# EAGLE board SparkFun_lsm9ds0-breakout-Panel-v10 (EAGLE 6.5.0), part 1 of 3
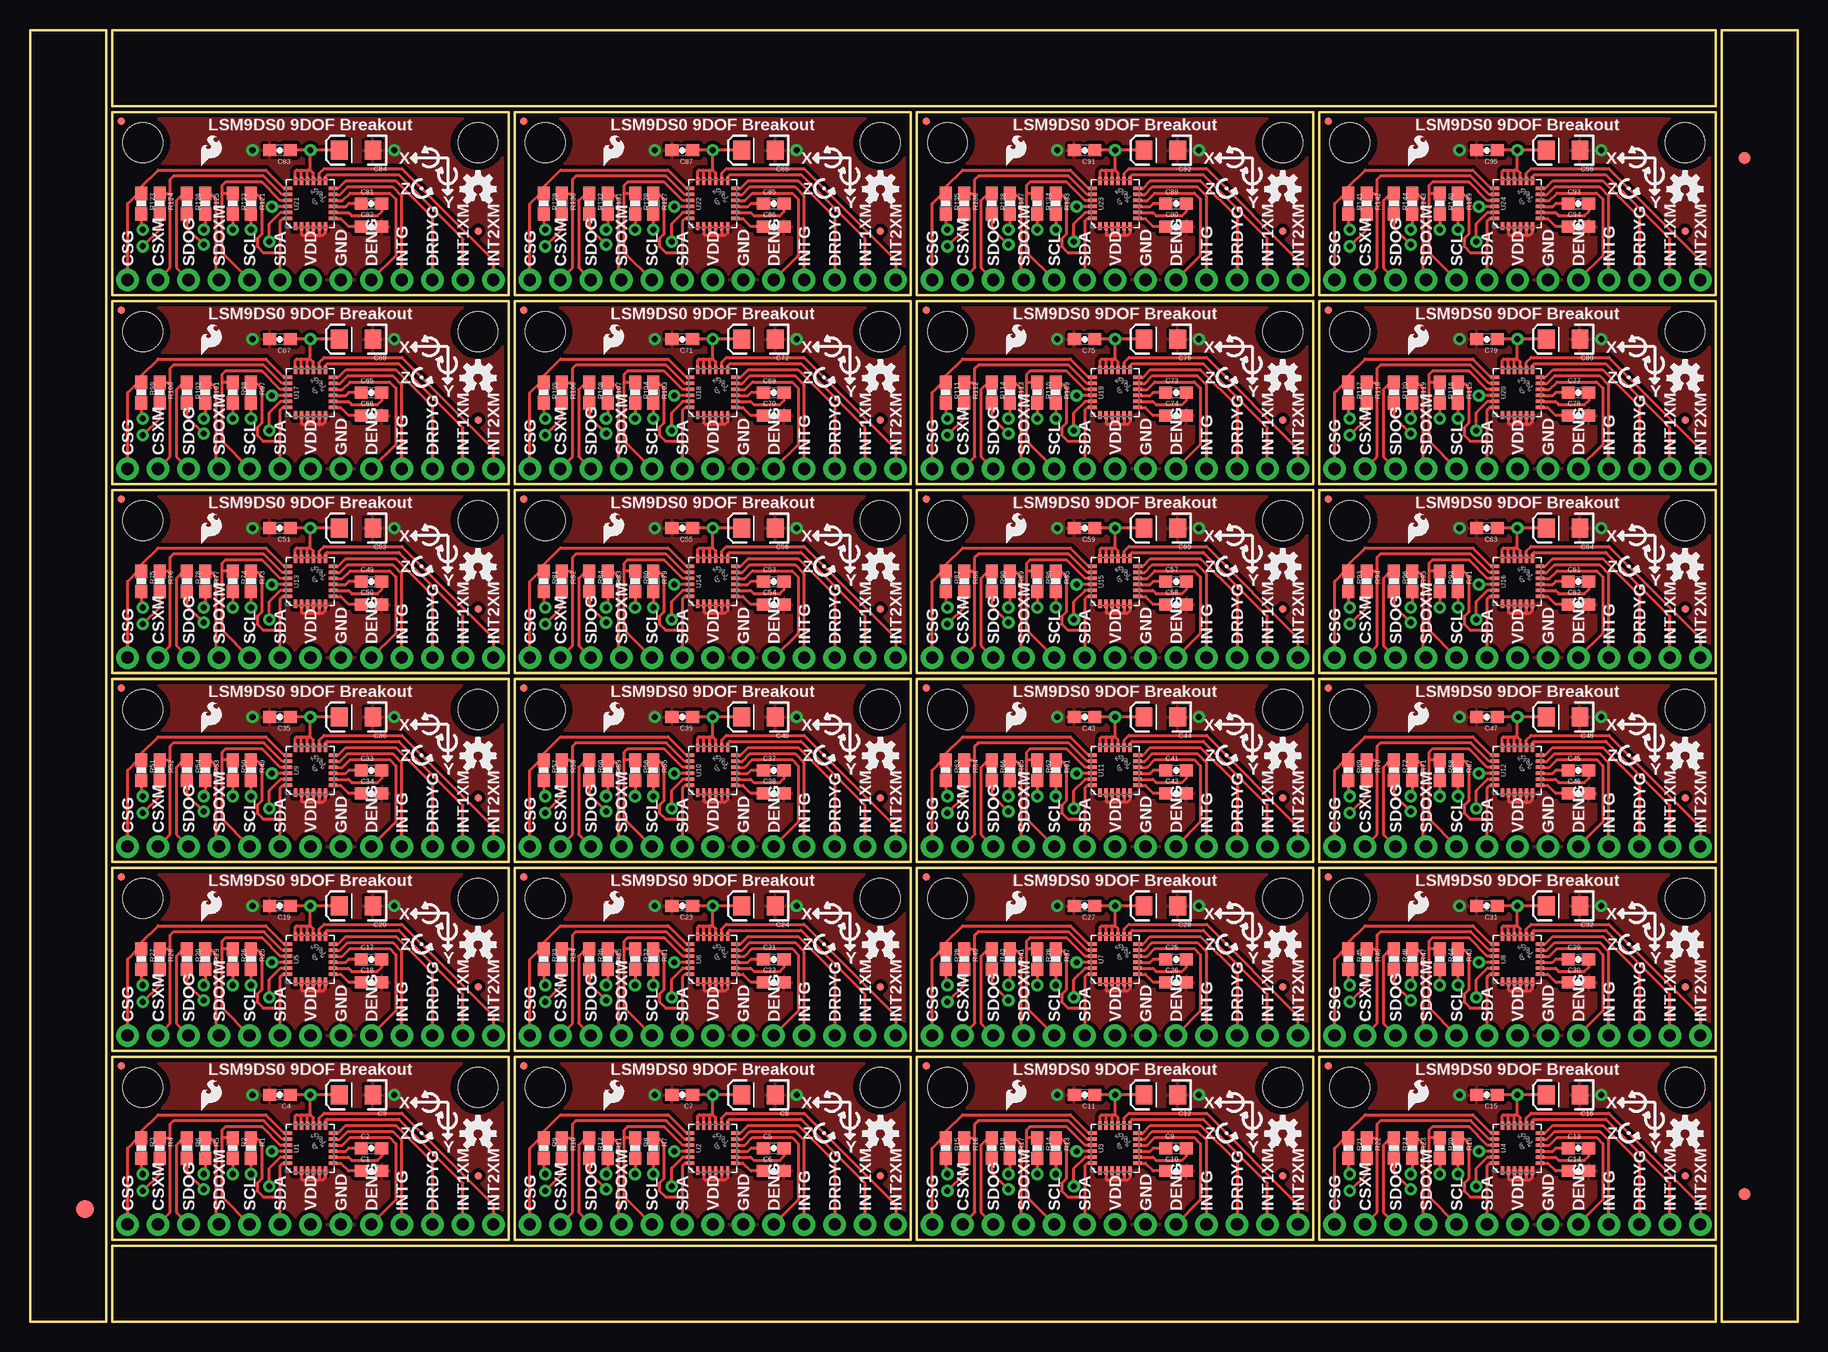
[diagram p0: board, top side]
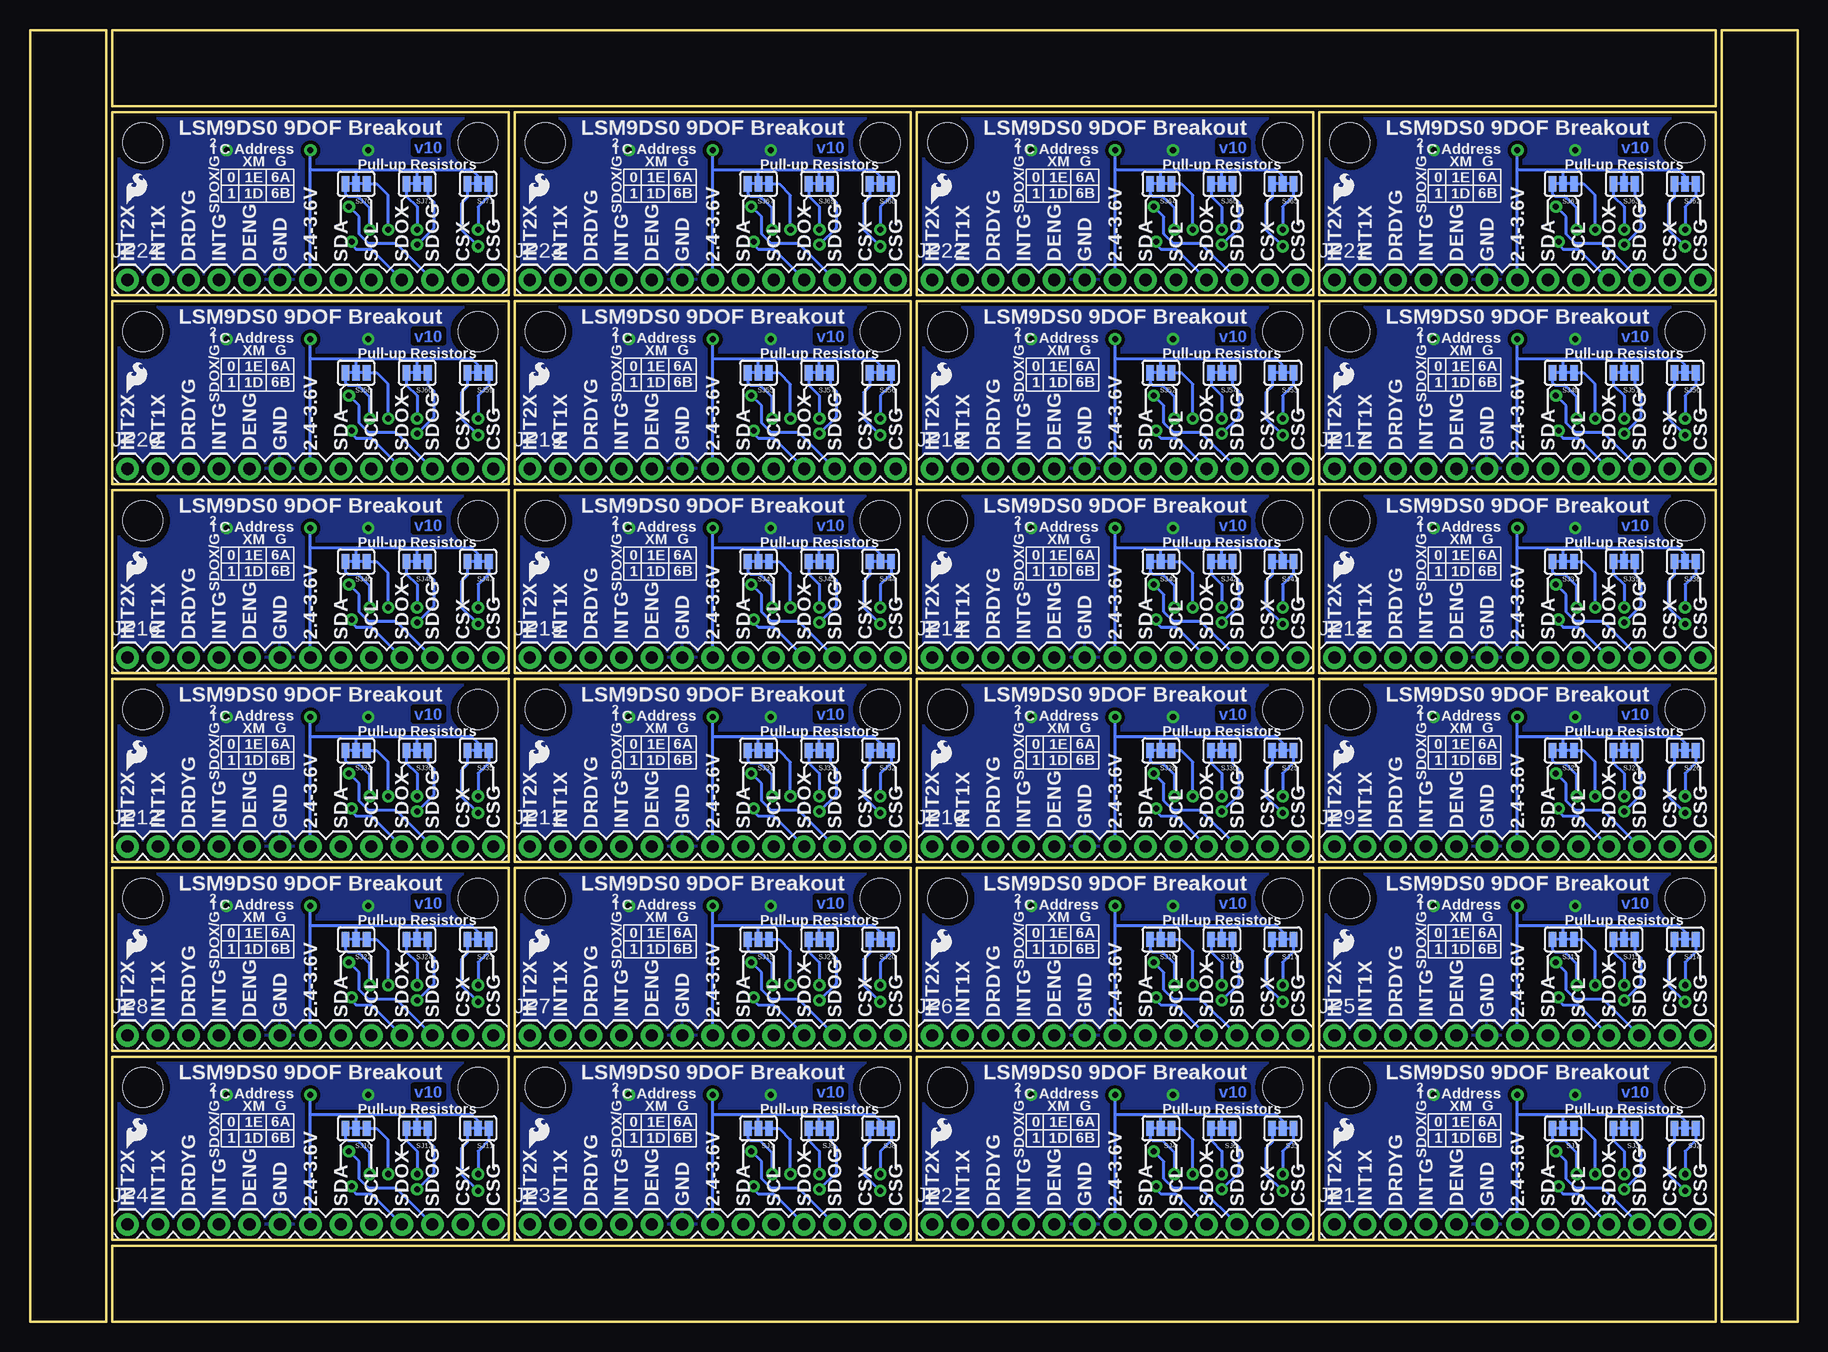
[diagram p1: board, bottom side, seen from below]

Size 147.32 x 107.7 mm. Coordinates in mm from the lower left corner, seen from the top.
Outline: 6.35,79.25 6.35,0 0,0 0,29.72
Outline: 147.32,79.25 147.32,0 140.97,0 140.97,29.72
Outline: 140.97,28.45 140.97,107.7 147.32,107.7 147.32,77.98
Outline: 0,28.45 0,107.7 6.35,107.7 6.35,77.98
Outline: 6.86,6.86 6.86,22.1 39.88,22.1 39.88,6.86 6.86,6.86
Outline: 40.39,6.86 40.39,22.1 73.41,22.1 73.41,6.86 40.39,6.86
Outline: 73.91,6.86 73.91,22.1 106.93,22.1 106.93,6.86 73.91,6.86
Outline: 107.44,6.86 107.44,22.1 140.46,22.1 140.46,6.86 107.44,6.86
Outline: 6.86,22.61 6.86,37.85 39.88,37.85 39.88,22.61 6.86,22.61
Outline: 40.39,22.61 40.39,37.85 73.41,37.85 73.41,22.61 40.39,22.61
Outline: 73.91,22.61 73.91,37.85 106.93,37.85 106.93,22.61 73.91,22.61
Outline: 107.44,22.61 107.44,37.85 140.46,37.85 140.46,22.61 107.44,22.61
Outline: 6.86,38.35 6.86,53.59 39.88,53.59 39.88,38.35 6.86,38.35
Outline: 40.39,38.35 40.39,53.59 73.41,53.59 73.41,38.35 40.39,38.35
Outline: 73.91,38.35 73.91,53.59 106.93,53.59 106.93,38.35 73.91,38.35
Outline: 107.44,38.35 107.44,53.59 140.46,53.59 140.46,38.35 107.44,38.35
Outline: 6.86,54.1 6.86,69.34 39.88,69.34 39.88,54.1 6.86,54.1
Outline: 40.39,54.1 40.39,69.34 73.41,69.34 73.41,54.1 40.39,54.1
Outline: 73.91,54.1 73.91,69.34 106.93,69.34 106.93,54.1 73.91,54.1
Outline: 107.44,54.1 107.44,69.34 140.46,69.34 140.46,54.1 107.44,54.1
Outline: 6.86,69.85 6.86,85.09 39.88,85.09 39.88,69.85 6.86,69.85
Outline: 40.39,69.85 40.39,85.09 73.41,85.09 73.41,69.85 40.39,69.85
Outline: 73.91,69.85 73.91,85.09 106.93,85.09 106.93,69.85 73.91,69.85
Outline: 107.44,69.85 107.44,85.09 140.46,85.09 140.46,69.85 107.44,69.85
Outline: 6.86,85.6 6.86,100.84 39.88,100.84 39.88,85.6 6.86,85.6
Outline: 40.39,85.6 40.39,100.84 73.41,100.84 73.41,85.6 40.39,85.6
Outline: 73.91,85.6 73.91,100.84 106.93,100.84 106.93,85.6 73.91,85.6
Outline: 107.44,85.6 107.44,100.84 140.46,100.84 140.46,85.6 107.44,85.6
Outline: 6.86,0 140.46,0 140.46,6.35 6.86,6.35 6.86,0
Outline: 140.46,107.7 6.86,107.7 6.86,101.35 140.46,101.35 140.46,107.7
Copper layers (1*16): Top 0.035mm / dielectric 1.5mm / Bottom 0.035mm
Design rules "SparkFun *": minimum track width 7mil, minimum drill 15mil, track to track 8mil, track to pad 8mil, pad to pad 8mil, via to via 8mil, smd to smd 8mil, copper to edge 8mil, drill to drill 8mil, minimum pad ring 12mil, minimum via ring 10mil, stop-mask expansion 4mil, vias tented up to drill 20mil, thermal gap 10mil
tRestrict: area 22.1,13.2 to 24.6,15.7; area 55.6,13.2 to 58.2,15.7; area 89.2,13.2 to 91.7,15.7; area 122.7,13.2 to 125.2,15.7; area 22.1,29 to 24.6,31.5; area 55.6,29 to 58.2,31.5; area 89.2,29 to 91.7,31.5; area 122.7,29 to 125.2,31.5; area 22.1,44.7 to 24.6,47.2; area 55.6,44.7 to 58.2,47.2; area 89.2,44.7 to 91.7,47.2; area 122.7,44.7 to 125.2,47.2; area 22.1,60.5 to 24.6,63; area 55.6,60.5 to 58.2,63; area 89.2,60.5 to 91.7,63; area 122.7,60.5 to 125.2,63; area 22.1,76.2 to 24.6,78.7; area 55.6,76.2 to 58.2,78.7; area 89.2,76.2 to 91.7,78.7; area 122.7,76.2 to 125.2,78.7; area 22.1,91.9 to 24.6,94.5; area 55.6,91.9 to 58.2,94.5; area 89.2,91.9 to 91.7,94.5; area 122.7,91.9 to 125.2,94.5

## Footprints (pad centres in the part's own frame; a part is rotated, then mirrored left to right if it is on the bottom)
0603-CAP = smd 1.1 x 1: 1 -0.85,0; 2 0.85,0
EIA3216 = smd 1.4 x 1.6: A 1.4,0; C -1.4,0
FIDUCIAL-1.5X3 = smd 1.5 x 1.5: 1 0,0
FIDUCIAL-1X2 = smd 1 x 1: 1 0,0
MICRO-FIDUCIAL = smd 0.635 x 0.635: 1 0,0
1X13 = drill 1.016 pad 1.88: 1 0,0; 2 2.54,0; 3 5.08,0; 4 7.62,0; 5 10.16,0; 6 12.7,0; 7 15.24,0; 8 17.78,0; 9 20.32,0; 10 22.86,0; 11 25.4,0; 12 27.94,0; 13 30.48,0
0603-RES = smd 1.1 x 1: 1 -0.85,0; 2 0.85,0
SJ_3 = smd 0.635 x 1.27: 1 -0.889,0; 2 0,0; 3 0.889,0
STAND-OFF = hole 3.302: 0,0
LGA-24 = smd 0.7 x 0.29: 1 -1.875,1.25; 2 -1.875,0.75; 3 -1.875,0.25; 4 -1.875,-0.25; 5 -1.875,-0.75; 6 -1.875,-1.25; 13 1.875,-1.25; 14 1.875,-0.75; 15 1.875,-0.25; 16 1.875,0.25; 17 1.875,0.75; 18 1.875,1.25 | smd 0.29 x 0.7: 7 -1.25,-1.875; 8 -0.75,-1.875; 9 -0.25,-1.875; 10 0.25,-1.875; 11 0.75,-1.875; 12 1.25,-1.875; 19 1.25,1.875; 20 0.75,1.875; 21 0.25,1.875; 22 -0.25,1.875; 23 -0.75,1.875; 24 -1.25,1.875

## Placement (x,y rotation side)
C1  4.7uF  [0603-CAP]  28.45,12.57 0 top
C2  0.22uF  [0603-CAP]  28.45,14.48 0 top
C3  10uF  [EIA3216]  27.18,18.92 180 top
C4  1.0uF  [0603-CAP]  20.83,18.92 180 top
C5  0.22uF  [0603-CAP]  61.98,14.48 0 top
C6  4.7uF  [0603-CAP]  61.98,12.57 0 top
C7  1.0uF  [0603-CAP]  54.36,18.92 180 top
C8  10uF  [EIA3216]  60.71,18.92 180 top
C9  0.22uF  [0603-CAP]  95.5,14.48 0 top
C10  4.7uF  [0603-CAP]  95.5,12.57 0 top
C11  1.0uF  [0603-CAP]  87.88,18.92 180 top
C12  10uF  [EIA3216]  94.23,18.92 180 top
C13  0.22uF  [0603-CAP]  129.03,14.48 0 top
C14  4.7uF  [0603-CAP]  129.03,12.57 0 top
C15  1.0uF  [0603-CAP]  121.41,18.92 180 top
C16  10uF  [EIA3216]  127.76,18.92 180 top
C17  0.22uF  [0603-CAP]  28.45,30.23 0 top
C18  4.7uF  [0603-CAP]  28.45,28.32 0 top
C19  1.0uF  [0603-CAP]  20.83,34.67 180 top
C20  10uF  [EIA3216]  27.18,34.67 180 top
C21  0.22uF  [0603-CAP]  61.98,30.23 0 top
C22  4.7uF  [0603-CAP]  61.98,28.32 0 top
C23  1.0uF  [0603-CAP]  54.36,34.67 180 top
C24  10uF  [EIA3216]  60.71,34.67 180 top
C25  0.22uF  [0603-CAP]  95.5,30.23 0 top
C26  4.7uF  [0603-CAP]  95.5,28.32 0 top
C27  1.0uF  [0603-CAP]  87.88,34.67 180 top
C28  10uF  [EIA3216]  94.23,34.67 180 top
C29  0.22uF  [0603-CAP]  129.03,30.23 0 top
C30  4.7uF  [0603-CAP]  129.03,28.32 0 top
C31  1.0uF  [0603-CAP]  121.41,34.67 180 top
C32  10uF  [EIA3216]  127.76,34.67 180 top
C33  0.22uF  [0603-CAP]  28.45,45.97 0 top
C34  4.7uF  [0603-CAP]  28.45,44.07 0 top
C35  1.0uF  [0603-CAP]  20.83,50.42 180 top
C36  10uF  [EIA3216]  27.18,50.42 180 top
C37  0.22uF  [0603-CAP]  61.98,45.97 0 top
C38  4.7uF  [0603-CAP]  61.98,44.07 0 top
C39  1.0uF  [0603-CAP]  54.36,50.42 180 top
C40  10uF  [EIA3216]  60.71,50.42 180 top
C41  0.22uF  [0603-CAP]  95.5,45.97 0 top
C42  4.7uF  [0603-CAP]  95.5,44.07 0 top
C43  1.0uF  [0603-CAP]  87.88,50.42 180 top
C44  10uF  [EIA3216]  94.23,50.42 180 top
C45  0.22uF  [0603-CAP]  129.03,45.97 0 top
C46  4.7uF  [0603-CAP]  129.03,44.07 0 top
C47  1.0uF  [0603-CAP]  121.41,50.42 180 top
C48  10uF  [EIA3216]  127.76,50.42 180 top
C49  0.22uF  [0603-CAP]  28.45,61.72 0 top
C50  4.7uF  [0603-CAP]  28.45,59.82 0 top
C51  1.0uF  [0603-CAP]  20.83,66.17 180 top
C52  10uF  [EIA3216]  27.18,66.17 180 top
C53  0.22uF  [0603-CAP]  61.98,61.72 0 top
C54  4.7uF  [0603-CAP]  61.98,59.82 0 top
C55  1.0uF  [0603-CAP]  54.36,66.17 180 top
C56  10uF  [EIA3216]  60.71,66.17 180 top
C57  0.22uF  [0603-CAP]  95.5,61.72 0 top
C58  4.7uF  [0603-CAP]  95.5,59.82 0 top
C59  1.0uF  [0603-CAP]  87.88,66.17 180 top
C60  10uF  [EIA3216]  94.23,66.17 180 top
C61  0.22uF  [0603-CAP]  129.03,61.72 0 top
C62  4.7uF  [0603-CAP]  129.03,59.82 0 top
C63  1.0uF  [0603-CAP]  121.41,66.17 180 top
C64  10uF  [EIA3216]  127.76,66.17 180 top
C65  0.22uF  [0603-CAP]  28.45,77.47 0 top
C66  4.7uF  [0603-CAP]  28.45,75.56 0 top
C67  1.0uF  [0603-CAP]  20.83,81.92 180 top
C68  10uF  [EIA3216]  27.18,81.92 180 top
C69  0.22uF  [0603-CAP]  61.98,77.47 0 top
C70  4.7uF  [0603-CAP]  61.98,75.56 0 top
C71  1.0uF  [0603-CAP]  54.36,81.92 180 top
C72  10uF  [EIA3216]  60.71,81.92 180 top
C73  0.22uF  [0603-CAP]  95.5,77.47 0 top
C74  4.7uF  [0603-CAP]  95.5,75.56 0 top
C75  1.0uF  [0603-CAP]  87.88,81.92 180 top
C76  10uF  [EIA3216]  94.23,81.92 180 top
C77  0.22uF  [0603-CAP]  129.03,77.47 0 top
C78  4.7uF  [0603-CAP]  129.03,75.56 0 top
C79  1.0uF  [0603-CAP]  121.41,81.92 180 top
C80  10uF  [EIA3216]  127.76,81.92 180 top
C81  0.22uF  [0603-CAP]  28.45,93.22 0 top
C82  4.7uF  [0603-CAP]  28.45,91.31 0 top
C83  1.0uF  [0603-CAP]  20.83,97.66 180 top
C84  10uF  [EIA3216]  27.18,97.66 180 top
C85  0.22uF  [0603-CAP]  61.98,93.22 0 top
C86  4.7uF  [0603-CAP]  61.98,91.31 0 top
C87  1.0uF  [0603-CAP]  54.36,97.66 180 top
C88  10uF  [EIA3216]  60.71,97.66 180 top
C89  0.22uF  [0603-CAP]  95.5,93.22 0 top
C90  4.7uF  [0603-CAP]  95.5,91.31 0 top
C91  1.0uF  [0603-CAP]  87.88,97.66 180 top
C92  10uF  [EIA3216]  94.23,97.66 180 top
C93  0.22uF  [0603-CAP]  129.03,93.22 0 top
C94  4.7uF  [0603-CAP]  129.03,91.31 0 top
C95  1.0uF  [0603-CAP]  121.41,97.66 180 top
C96  10uF  [EIA3216]  127.76,97.66 180 top
E$1  [FIDUCIAL-1.5X3]  4.57,9.4 0 top
E$4  [FIDUCIAL-1X2]  142.88,10.67 0 top
E$5  [FIDUCIAL-1X2]  142.88,97.03 180 top
FID1  FIDUCIALUFIDUCIAL  [MICRO-FIDUCIAL]  37.34,12.19 0 top
FID2  FIDUCIALUFIDUCIAL  [MICRO-FIDUCIAL]  7.62,21.34 0 top
FID3  FIDUCIALUFIDUCIAL  [MICRO-FIDUCIAL]  70.87,12.19 0 top
FID4  FIDUCIALUFIDUCIAL  [MICRO-FIDUCIAL]  41.15,21.34 0 top
FID5  FIDUCIALUFIDUCIAL  [MICRO-FIDUCIAL]  104.39,12.19 0 top
FID6  FIDUCIALUFIDUCIAL  [MICRO-FIDUCIAL]  74.68,21.34 0 top
FID7  FIDUCIALUFIDUCIAL  [MICRO-FIDUCIAL]  137.92,12.19 0 top
FID8  FIDUCIALUFIDUCIAL  [MICRO-FIDUCIAL]  108.2,21.34 0 top
FID9  FIDUCIALUFIDUCIAL  [MICRO-FIDUCIAL]  37.34,27.94 0 top
FID10  FIDUCIALUFIDUCIAL  [MICRO-FIDUCIAL]  7.62,37.08 0 top
FID11  FIDUCIALUFIDUCIAL  [MICRO-FIDUCIAL]  70.87,27.94 0 top
FID12  FIDUCIALUFIDUCIAL  [MICRO-FIDUCIAL]  41.15,37.08 0 top
FID13  FIDUCIALUFIDUCIAL  [MICRO-FIDUCIAL]  104.39,27.94 0 top
FID14  FIDUCIALUFIDUCIAL  [MICRO-FIDUCIAL]  74.68,37.08 0 top
FID15  FIDUCIALUFIDUCIAL  [MICRO-FIDUCIAL]  137.92,27.94 0 top
FID16  FIDUCIALUFIDUCIAL  [MICRO-FIDUCIAL]  108.2,37.08 0 top
FID17  FIDUCIALUFIDUCIAL  [MICRO-FIDUCIAL]  37.34,43.69 0 top
FID18  FIDUCIALUFIDUCIAL  [MICRO-FIDUCIAL]  7.62,52.83 0 top
FID19  FIDUCIALUFIDUCIAL  [MICRO-FIDUCIAL]  70.87,43.69 0 top
FID20  FIDUCIALUFIDUCIAL  [MICRO-FIDUCIAL]  41.15,52.83 0 top
FID21  FIDUCIALUFIDUCIAL  [MICRO-FIDUCIAL]  104.39,43.69 0 top
FID22  FIDUCIALUFIDUCIAL  [MICRO-FIDUCIAL]  74.68,52.83 0 top
FID23  FIDUCIALUFIDUCIAL  [MICRO-FIDUCIAL]  137.92,43.69 0 top
FID24  FIDUCIALUFIDUCIAL  [MICRO-FIDUCIAL]  108.2,52.83 0 top
FID25  FIDUCIALUFIDUCIAL  [MICRO-FIDUCIAL]  37.34,59.44 0 top
FID26  FIDUCIALUFIDUCIAL  [MICRO-FIDUCIAL]  7.62,68.58 0 top
FID27  FIDUCIALUFIDUCIAL  [MICRO-FIDUCIAL]  70.87,59.44 0 top
FID28  FIDUCIALUFIDUCIAL  [MICRO-FIDUCIAL]  41.15,68.58 0 top
FID29  FIDUCIALUFIDUCIAL  [MICRO-FIDUCIAL]  104.39,59.44 0 top
FID30  FIDUCIALUFIDUCIAL  [MICRO-FIDUCIAL]  74.68,68.58 0 top
FID31  FIDUCIALUFIDUCIAL  [MICRO-FIDUCIAL]  137.92,59.44 0 top
FID32  FIDUCIALUFIDUCIAL  [MICRO-FIDUCIAL]  108.2,68.58 0 top
FID33  FIDUCIALUFIDUCIAL  [MICRO-FIDUCIAL]  37.34,75.18 0 top
FID34  FIDUCIALUFIDUCIAL  [MICRO-FIDUCIAL]  7.62,84.33 0 top
FID35  FIDUCIALUFIDUCIAL  [MICRO-FIDUCIAL]  70.87,75.18 0 top
FID36  FIDUCIALUFIDUCIAL  [MICRO-FIDUCIAL]  41.15,84.33 0 top
FID37  FIDUCIALUFIDUCIAL  [MICRO-FIDUCIAL]  104.39,75.18 0 top
FID38  FIDUCIALUFIDUCIAL  [MICRO-FIDUCIAL]  74.68,84.33 0 top
FID39  FIDUCIALUFIDUCIAL  [MICRO-FIDUCIAL]  137.92,75.18 0 top
FID40  FIDUCIALUFIDUCIAL  [MICRO-FIDUCIAL]  108.2,84.33 0 top
FID41  FIDUCIALUFIDUCIAL  [MICRO-FIDUCIAL]  37.34,90.93 0 top
FID42  FIDUCIALUFIDUCIAL  [MICRO-FIDUCIAL]  7.62,100.08 0 top
FID43  FIDUCIALUFIDUCIAL  [MICRO-FIDUCIAL]  70.87,90.93 0 top
FID44  FIDUCIALUFIDUCIAL  [MICRO-FIDUCIAL]  41.15,100.08 0 top
FID45  FIDUCIALUFIDUCIAL  [MICRO-FIDUCIAL]  104.39,90.93 0 top
FID46  FIDUCIALUFIDUCIAL  [MICRO-FIDUCIAL]  74.68,100.08 0 top
FID47  FIDUCIALUFIDUCIAL  [MICRO-FIDUCIAL]  137.92,90.93 0 top
FID48  FIDUCIALUFIDUCIAL  [MICRO-FIDUCIAL]  108.2,100.08 0 top
JP1  M13  [1X13]  38.61,8.13 0 bottom
JP2  M13  [1X13]  72.14,8.13 0 bottom
JP3  M13  [1X13]  105.66,8.13 0 bottom
JP4  M13  [1X13]  139.19,8.13 0 bottom
JP5  M13  [1X13]  38.61,23.88 0 bottom
JP6  M13  [1X13]  72.14,23.88 0 bottom
JP7  M13  [1X13]  105.66,23.88 0 bottom
JP8  M13  [1X13]  139.19,23.88 0 bottom
JP9  M13  [1X13]  38.61,39.62 0 bottom
JP10  M13  [1X13]  72.14,39.62 0 bottom
JP11  M13  [1X13]  105.66,39.62 0 bottom
JP12  M13  [1X13]  139.19,39.62 0 bottom
JP13  M13  [1X13]  38.61,55.37 0 bottom
JP14  M13  [1X13]  72.14,55.37 0 bottom
JP15  M13  [1X13]  105.66,55.37 0 bottom
JP16  M13  [1X13]  139.19,55.37 0 bottom
JP17  M13  [1X13]  38.61,71.12 0 bottom
JP18  M13  [1X13]  72.14,71.12 0 bottom
JP19  M13  [1X13]  105.66,71.12 0 bottom
JP20  M13  [1X13]  139.19,71.12 0 bottom
JP21  M13  [1X13]  38.61,86.87 0 bottom
JP22  M13  [1X13]  72.14,86.87 0 bottom
JP23  M13  [1X13]  105.66,86.87 0 bottom
JP24  M13  [1X13]  139.19,86.87 0 bottom
LOGO1  OSHW-LOGOS  [OSHW-LOGO-S]  37.34,15.68 0 top
LOGO2  SFE_LOGO_FLAME.1_INCH  [SFE_LOGO_FLAME_.1]  38.99,14.1 0 bottom
LOGO3  SFE_LOGO_FLAME.1_INCH  [SFE_LOGO_FLAME_.1]  13.97,17.27 0 top
LOGO4  OSHW-LOGOS  [OSHW-LOGO-S]  70.87,15.68 0 top
LOGO5  SFE_LOGO_FLAME.1_INCH  [SFE_LOGO_FLAME_.1]  47.5,17.27 0 top
LOGO6  SFE_LOGO_FLAME.1_INCH  [SFE_LOGO_FLAME_.1]  72.52,14.1 0 bottom
LOGO7  OSHW-LOGOS  [OSHW-LOGO-S]  104.39,15.68 0 top
LOGO8  SFE_LOGO_FLAME.1_INCH  [SFE_LOGO_FLAME_.1]  81.03,17.27 0 top
LOGO9  SFE_LOGO_FLAME.1_INCH  [SFE_LOGO_FLAME_.1]  106.05,14.1 0 bottom
LOGO10  OSHW-LOGOS  [OSHW-LOGO-S]  137.92,15.68 0 top
LOGO11  SFE_LOGO_FLAME.1_INCH  [SFE_LOGO_FLAME_.1]  114.55,17.27 0 top
LOGO12  SFE_LOGO_FLAME.1_INCH  [SFE_LOGO_FLAME_.1]  139.57,14.1 0 bottom
LOGO13  OSHW-LOGOS  [OSHW-LOGO-S]  37.34,31.43 0 top
LOGO14  SFE_LOGO_FLAME.1_INCH  [SFE_LOGO_FLAME_.1]  13.97,33.02 0 top
LOGO15  SFE_LOGO_FLAME.1_INCH  [SFE_LOGO_FLAME_.1]  38.99,29.84 0 bottom
LOGO16  OSHW-LOGOS  [OSHW-LOGO-S]  70.87,31.43 0 top
LOGO17  SFE_LOGO_FLAME.1_INCH  [SFE_LOGO_FLAME_.1]  47.5,33.02 0 top
LOGO18  SFE_LOGO_FLAME.1_INCH  [SFE_LOGO_FLAME_.1]  72.52,29.84 0 bottom
LOGO19  OSHW-LOGOS  [OSHW-LOGO-S]  104.39,31.43 0 top
LOGO20  SFE_LOGO_FLAME.1_INCH  [SFE_LOGO_FLAME_.1]  81.03,33.02 0 top
LOGO21  SFE_LOGO_FLAME.1_INCH  [SFE_LOGO_FLAME_.1]  106.05,29.84 0 bottom
LOGO22  OSHW-LOGOS  [OSHW-LOGO-S]  137.92,31.43 0 top
LOGO23  SFE_LOGO_FLAME.1_INCH  [SFE_LOGO_FLAME_.1]  114.55,33.02 0 top
LOGO24  SFE_LOGO_FLAME.1_INCH  [SFE_LOGO_FLAME_.1]  139.57,29.84 0 bottom
LOGO25  OSHW-LOGOS  [OSHW-LOGO-S]  37.34,47.18 0 top
LOGO26  SFE_LOGO_FLAME.1_INCH  [SFE_LOGO_FLAME_.1]  13.97,48.77 0 top
LOGO27  SFE_LOGO_FLAME.1_INCH  [SFE_LOGO_FLAME_.1]  38.99,45.59 0 bottom
LOGO28  OSHW-LOGOS  [OSHW-LOGO-S]  70.87,47.18 0 top
LOGO29  SFE_LOGO_FLAME.1_INCH  [SFE_LOGO_FLAME_.1]  47.5,48.77 0 top
LOGO30  SFE_LOGO_FLAME.1_INCH  [SFE_LOGO_FLAME_.1]  72.52,45.59 0 bottom
LOGO31  OSHW-LOGOS  [OSHW-LOGO-S]  104.39,47.18 0 top
LOGO32  SFE_LOGO_FLAME.1_INCH  [SFE_LOGO_FLAME_.1]  81.03,48.77 0 top
LOGO33  SFE_LOGO_FLAME.1_INCH  [SFE_LOGO_FLAME_.1]  106.05,45.59 0 bottom
LOGO34  OSHW-LOGOS  [OSHW-LOGO-S]  137.92,47.18 0 top
LOGO35  SFE_LOGO_FLAME.1_INCH  [SFE_LOGO_FLAME_.1]  114.55,48.77 0 top
LOGO36  SFE_LOGO_FLAME.1_INCH  [SFE_LOGO_FLAME_.1]  139.57,45.59 0 bottom
LOGO37  OSHW-LOGOS  [OSHW-LOGO-S]  37.34,62.93 0 top
LOGO38  SFE_LOGO_FLAME.1_INCH  [SFE_LOGO_FLAME_.1]  13.97,64.52 0 top
LOGO39  SFE_LOGO_FLAME.1_INCH  [SFE_LOGO_FLAME_.1]  38.99,61.34 0 bottom
LOGO40  OSHW-LOGOS  [OSHW-LOGO-S]  70.87,62.93 0 top
LOGO41  SFE_LOGO_FLAME.1_INCH  [SFE_LOGO_FLAME_.1]  47.5,64.52 0 top
LOGO42  SFE_LOGO_FLAME.1_INCH  [SFE_LOGO_FLAME_.1]  72.52,61.34 0 bottom
LOGO43  OSHW-LOGOS  [OSHW-LOGO-S]  104.39,62.93 0 top
LOGO44  SFE_LOGO_FLAME.1_INCH  [SFE_LOGO_FLAME_.1]  81.03,64.52 0 top
LOGO45  SFE_LOGO_FLAME.1_INCH  [SFE_LOGO_FLAME_.1]  106.05,61.34 0 bottom
LOGO46  OSHW-LOGOS  [OSHW-LOGO-S]  137.92,62.93 0 top
LOGO47  SFE_LOGO_FLAME.1_INCH  [SFE_LOGO_FLAME_.1]  114.55,64.52 0 top
LOGO48  SFE_LOGO_FLAME.1_INCH  [SFE_LOGO_FLAME_.1]  139.57,61.34 0 bottom
LOGO49  OSHW-LOGOS  [OSHW-LOGO-S]  37.34,78.68 0 top
LOGO50  SFE_LOGO_FLAME.1_INCH  [SFE_LOGO_FLAME_.1]  13.97,80.26 0 top
LOGO51  SFE_LOGO_FLAME.1_INCH  [SFE_LOGO_FLAME_.1]  38.99,77.09 0 bottom
LOGO52  OSHW-LOGOS  [OSHW-LOGO-S]  70.87,78.68 0 top
LOGO53  SFE_LOGO_FLAME.1_INCH  [SFE_LOGO_FLAME_.1]  47.5,80.26 0 top
LOGO54  SFE_LOGO_FLAME.1_INCH  [SFE_LOGO_FLAME_.1]  72.52,77.09 0 bottom
LOGO55  OSHW-LOGOS  [OSHW-LOGO-S]  104.39,78.68 0 top
LOGO56  SFE_LOGO_FLAME.1_INCH  [SFE_LOGO_FLAME_.1]  81.03,80.26 0 top
LOGO57  SFE_LOGO_FLAME.1_INCH  [SFE_LOGO_FLAME_.1]  106.05,77.09 0 bottom
LOGO58  OSHW-LOGOS  [OSHW-LOGO-S]  137.92,78.68 0 top
LOGO59  SFE_LOGO_FLAME.1_INCH  [SFE_LOGO_FLAME_.1]  114.55,80.26 0 top
LOGO60  SFE_LOGO_FLAME.1_INCH  [SFE_LOGO_FLAME_.1]  139.57,77.09 0 bottom
LOGO61  OSHW-LOGOS  [OSHW-LOGO-S]  37.34,94.42 0 top
LOGO62  SFE_LOGO_FLAME.1_INCH  [SFE_LOGO_FLAME_.1]  13.97,96.01 0 top
LOGO63  SFE_LOGO_FLAME.1_INCH  [SFE_LOGO_FLAME_.1]  38.99,92.84 0 bottom
LOGO64  OSHW-LOGOS  [OSHW-LOGO-S]  70.87,94.42 0 top
LOGO65  SFE_LOGO_FLAME.1_INCH  [SFE_LOGO_FLAME_.1]  47.5,96.01 0 top
LOGO66  SFE_LOGO_FLAME.1_INCH  [SFE_LOGO_FLAME_.1]  72.52,92.84 0 bottom
LOGO67  OSHW-LOGOS  [OSHW-LOGO-S]  104.39,94.42 0 top
LOGO68  SFE_LOGO_FLAME.1_INCH  [SFE_LOGO_FLAME_.1]  81.03,96.01 0 top
LOGO69  SFE_LOGO_FLAME.1_INCH  [SFE_LOGO_FLAME_.1]  106.05,92.84 0 bottom
LOGO70  OSHW-LOGOS  [OSHW-LOGO-S]  137.92,94.42 0 top
LOGO71  SFE_LOGO_FLAME.1_INCH  [SFE_LOGO_FLAME_.1]  114.55,96.01 0 top
LOGO72  SFE_LOGO_FLAME.1_INCH  [SFE_LOGO_FLAME_.1]  139.57,92.84 0 bottom
R1  10k  [0603-RES]  18.41,14.48 270 top
R2  10k  [0603-RES]  16.89,14.48 270 top
R3  10k  [0603-RES]  9.27,14.48 270 top
R4  10k  [0603-RES]  10.79,14.48 270 top
R5  10k  [0603-RES]  14.61,14.48 270 top
R6  10k  [0603-RES]  13.08,14.48 270 top
R7  10k  [0603-RES]  51.94,14.48 270 top
R8  10k  [0603-RES]  50.42,14.48 270 top
R9  10k  [0603-RES]  42.8,14.48 270 top
R10  10k  [0603-RES]  44.32,14.48 270 top
R11  10k  [0603-RES]  48.13,14.48 270 top
R12  10k  [0603-RES]  46.61,14.48 270 top
R13  10k  [0603-RES]  85.47,14.48 270 top
R14  10k  [0603-RES]  83.95,14.48 270 top
R15  10k  [0603-RES]  76.33,14.48 270 top
R16  10k  [0603-RES]  77.85,14.48 270 top
R17  10k  [0603-RES]  81.66,14.48 270 top
R18  10k  [0603-RES]  80.14,14.48 270 top
R19  10k  [0603-RES]  119,14.48 270 top
R20  10k  [0603-RES]  117.47,14.48 270 top
R21  10k  [0603-RES]  109.86,14.48 270 top
R22  10k  [0603-RES]  111.38,14.48 270 top
R23  10k  [0603-RES]  115.19,14.48 270 top
R24  10k  [0603-RES]  113.67,14.48 270 top
R25  10k  [0603-RES]  18.41,30.23 270 top
R26  10k  [0603-RES]  16.89,30.23 270 top
R27  10k  [0603-RES]  9.27,30.23 270 top
R28  10k  [0603-RES]  10.79,30.23 270 top
R29  10k  [0603-RES]  14.61,30.23 270 top
R30  10k  [0603-RES]  13.08,30.23 270 top
R31  10k  [0603-RES]  51.94,30.23 270 top
R32  10k  [0603-RES]  50.42,30.23 270 top
R33  10k  [0603-RES]  42.8,30.23 270 top
R34  10k  [0603-RES]  44.32,30.23 270 top
R35  10k  [0603-RES]  48.13,30.23 270 top
R36  10k  [0603-RES]  46.61,30.23 270 top
R37  10k  [0603-RES]  85.47,30.23 270 top
R38  10k  [0603-RES]  83.95,30.23 270 top
R39  10k  [0603-RES]  76.33,30.23 270 top
R40  10k  [0603-RES]  77.85,30.23 270 top
R41  10k  [0603-RES]  81.66,30.23 270 top
R42  10k  [0603-RES]  80.14,30.23 270 top
R43  10k  [0603-RES]  119,30.23 270 top
R44  10k  [0603-RES]  117.47,30.23 270 top
R45  10k  [0603-RES]  109.86,30.23 270 top
R46  10k  [0603-RES]  111.38,30.23 270 top
R47  10k  [0603-RES]  115.19,30.23 270 top
R48  10k  [0603-RES]  113.67,30.23 270 top
R49  10k  [0603-RES]  18.41,45.97 270 top
R50  10k  [0603-RES]  16.89,45.97 270 top
R51  10k  [0603-RES]  9.27,45.97 270 top
R52  10k  [0603-RES]  10.79,45.97 270 top
R53  10k  [0603-RES]  14.61,45.97 270 top
R54  10k  [0603-RES]  13.08,45.97 270 top
R55  10k  [0603-RES]  51.94,45.97 270 top
R56  10k  [0603-RES]  50.42,45.97 270 top
R57  10k  [0603-RES]  42.8,45.97 270 top
R58  10k  [0603-RES]  44.32,45.97 270 top
R59  10k  [0603-RES]  48.13,45.97 270 top
R60  10k  [0603-RES]  46.61,45.97 270 top
R61  10k  [0603-RES]  85.47,45.97 270 top
R62  10k  [0603-RES]  83.95,45.97 270 top
R63  10k  [0603-RES]  76.33,45.97 270 top
R64  10k  [0603-RES]  77.85,45.97 270 top
R65  10k  [0603-RES]  81.66,45.97 270 top
R66  10k  [0603-RES]  80.14,45.97 270 top
R67  10k  [0603-RES]  119,45.97 270 top
R68  10k  [0603-RES]  117.47,45.97 270 top
R69  10k  [0603-RES]  109.86,45.97 270 top
R70  10k  [0603-RES]  111.38,45.97 270 top
R71  10k  [0603-RES]  115.19,45.97 270 top
R72  10k  [0603-RES]  113.67,45.97 270 top
R73  10k  [0603-RES]  18.41,61.72 270 top
R74  10k  [0603-RES]  16.89,61.72 270 top
R75  10k  [0603-RES]  9.27,61.72 270 top
R76  10k  [0603-RES]  10.79,61.72 270 top
R77  10k  [0603-RES]  14.61,61.72 270 top
R78  10k  [0603-RES]  13.08,61.72 270 top
R79  10k  [0603-RES]  51.94,61.72 270 top
R80  10k  [0603-RES]  50.42,61.72 270 top
R81  10k  [0603-RES]  42.8,61.72 270 top
R82  10k  [0603-RES]  44.32,61.72 270 top
R83  10k  [0603-RES]  48.13,61.72 270 top
R84  10k  [0603-RES]  46.61,61.72 270 top
R85  10k  [0603-RES]  85.47,61.72 270 top
R86  10k  [0603-RES]  83.95,61.72 270 top
R87  10k  [0603-RES]  76.33,61.72 270 top
R88  10k  [0603-RES]  77.85,61.72 270 top
R89  10k  [0603-RES]  81.66,61.72 270 top
R90  10k  [0603-RES]  80.14,61.72 270 top
R91  10k  [0603-RES]  119,61.72 270 top
R92  10k  [0603-RES]  117.47,61.72 270 top
R93  10k  [0603-RES]  109.86,61.72 270 top
R94  10k  [0603-RES]  111.38,61.72 270 top
R95  10k  [0603-RES]  115.19,61.72 270 top
R96  10k  [0603-RES]  113.67,61.72 270 top
R97  10k  [0603-RES]  18.41,77.47 270 top
R98  10k  [0603-RES]  16.89,77.47 270 top
R99  10k  [0603-RES]  9.27,77.47 270 top
R100  10k  [0603-RES]  10.79,77.47 270 top
R101  10k  [0603-RES]  14.61,77.47 270 top
R102  10k  [0603-RES]  13.08,77.47 270 top
R103  10k  [0603-RES]  51.94,77.47 270 top
R104  10k  [0603-RES]  50.42,77.47 270 top
R105  10k  [0603-RES]  42.8,77.47 270 top
R106  10k  [0603-RES]  44.32,77.47 270 top
R107  10k  [0603-RES]  48.13,77.47 270 top
R108  10k  [0603-RES]  46.61,77.47 270 top
R109  10k  [0603-RES]  85.47,77.47 270 top
R110  10k  [0603-RES]  83.95,77.47 270 top
R111  10k  [0603-RES]  76.33,77.47 270 top
R112  10k  [0603-RES]  77.85,77.47 270 top
R113  10k  [0603-RES]  81.66,77.47 270 top
R114  10k  [0603-RES]  80.14,77.47 270 top
R115  10k  [0603-RES]  119,77.47 270 top
R116  10k  [0603-RES]  117.47,77.47 270 top
R117  10k  [0603-RES]  109.86,77.47 270 top
R118  10k  [0603-RES]  111.38,77.47 270 top
R119  10k  [0603-RES]  115.19,77.47 270 top
R120  10k  [0603-RES]  113.67,77.47 270 top
R121  10k  [0603-RES]  18.41,93.22 270 top
R122  10k  [0603-RES]  16.89,93.22 270 top
R123  10k  [0603-RES]  9.27,93.22 270 top
R124  10k  [0603-RES]  10.79,93.22 270 top
R125  10k  [0603-RES]  14.61,93.22 270 top
R126  10k  [0603-RES]  13.08,93.22 270 top
R127  10k  [0603-RES]  51.94,93.22 270 top
R128  10k  [0603-RES]  50.42,93.22 270 top
R129  10k  [0603-RES]  42.8,93.22 270 top
R130  10k  [0603-RES]  44.32,93.22 270 top
R131  10k  [0603-RES]  48.13,93.22 270 top
R132  10k  [0603-RES]  46.61,93.22 270 top
R133  10k  [0603-RES]  85.47,93.22 270 top
R134  10k  [0603-RES]  83.95,93.22 270 top
R135  10k  [0603-RES]  76.33,93.22 270 top
R136  10k  [0603-RES]  77.85,93.22 270 top
R137  10k  [0603-RES]  81.66,93.22 270 top
R138  10k  [0603-RES]  80.14,93.22 270 top
R139  10k  [0603-RES]  119,93.22 270 top
R140  10k  [0603-RES]  117.47,93.22 270 top
R141  10k  [0603-RES]  109.86,93.22 270 top
R142  10k  [0603-RES]  111.38,93.22 270 top
R143  10k  [0603-RES]  115.19,93.22 270 top
R144  10k  [0603-RES]  113.67,93.22 270 top
SJ1  [SJ_3]  19.56,16.13 180 bottom
SJ2  [SJ_3]  9.4,16.13 180 bottom
SJ3  [SJ_3]  14.48,16.13 180 bottom
SJ4  [SJ_3]  53.09,16.13 180 bottom
SJ5  [SJ_3]  42.93,16.13 180 bottom
SJ6  [SJ_3]  48.01,16.13 180 bottom
SJ7  [SJ_3]  86.61,16.13 180 bottom
SJ8  [SJ_3]  76.45,16.13 180 bottom
SJ9  [SJ_3]  81.53,16.13 180 bottom
SJ10  [SJ_3]  120.14,16.13 180 bottom
SJ11  [SJ_3]  109.98,16.13 180 bottom
SJ12  [SJ_3]  115.06,16.13 180 bottom
SJ13  [SJ_3]  19.56,31.88 180 bottom
SJ14  [SJ_3]  9.4,31.88 180 bottom
SJ15  [SJ_3]  14.48,31.88 180 bottom
SJ16  [SJ_3]  53.09,31.88 180 bottom
SJ17  [SJ_3]  42.93,31.88 180 bottom
SJ18  [SJ_3]  48.01,31.88 180 bottom
SJ19  [SJ_3]  86.61,31.88 180 bottom
SJ20  [SJ_3]  76.45,31.88 180 bottom
SJ21  [SJ_3]  81.53,31.88 180 bottom
SJ22  [SJ_3]  120.14,31.88 180 bottom
SJ23  [SJ_3]  109.98,31.88 180 bottom
SJ24  [SJ_3]  115.06,31.88 180 bottom
SJ25  [SJ_3]  19.56,47.62 180 bottom
SJ26  [SJ_3]  9.4,47.62 180 bottom
SJ27  [SJ_3]  14.48,47.62 180 bottom
SJ28  [SJ_3]  53.09,47.62 180 bottom
SJ29  [SJ_3]  42.93,47.62 180 bottom
SJ30  [SJ_3]  48.01,47.62 180 bottom
SJ31  [SJ_3]  86.61,47.62 180 bottom
SJ32  [SJ_3]  76.45,47.62 180 bottom
SJ33  [SJ_3]  81.53,47.62 180 bottom
SJ34  [SJ_3]  120.14,47.62 180 bottom
SJ35  [SJ_3]  109.98,47.62 180 bottom
SJ36  [SJ_3]  115.06,47.62 180 bottom
SJ37  [SJ_3]  19.56,63.37 180 bottom
SJ38  [SJ_3]  9.4,63.37 180 bottom
SJ39  [SJ_3]  14.48,63.37 180 bottom
SJ40  [SJ_3]  53.09,63.37 180 bottom
SJ41  [SJ_3]  42.93,63.37 180 bottom
SJ42  [SJ_3]  48.01,63.37 180 bottom
SJ43  [SJ_3]  86.61,63.37 180 bottom
SJ44  [SJ_3]  76.45,63.37 180 bottom
SJ45  [SJ_3]  81.53,63.37 180 bottom
SJ46  [SJ_3]  120.14,63.37 180 bottom
SJ47  [SJ_3]  109.98,63.37 180 bottom
SJ48  [SJ_3]  115.06,63.37 180 bottom
SJ49  [SJ_3]  19.56,79.12 180 bottom
SJ50  [SJ_3]  9.4,79.12 180 bottom
SJ51  [SJ_3]  14.48,79.12 180 bottom
SJ52  [SJ_3]  53.09,79.12 180 bottom
SJ53  [SJ_3]  42.93,79.12 180 bottom
SJ54  [SJ_3]  48.01,79.12 180 bottom
SJ55  [SJ_3]  86.61,79.12 180 bottom
SJ56  [SJ_3]  76.45,79.12 180 bottom
SJ57  [SJ_3]  81.53,79.12 180 bottom
SJ58  [SJ_3]  120.14,79.12 180 bottom
SJ59  [SJ_3]  109.98,79.12 180 bottom
SJ60  [SJ_3]  115.06,79.12 180 bottom
SJ61  [SJ_3]  19.56,94.87 180 bottom
SJ62  [SJ_3]  9.4,94.87 180 bottom
SJ63  [SJ_3]  14.48,94.87 180 bottom
SJ64  [SJ_3]  53.09,94.87 180 bottom
SJ65  [SJ_3]  42.93,94.87 180 bottom
SJ66  [SJ_3]  48.01,94.87 180 bottom
SJ67  [SJ_3]  86.61,94.87 180 bottom
SJ68  [SJ_3]  76.45,94.87 180 bottom
SJ69  [SJ_3]  81.53,94.87 180 bottom
SJ70  [SJ_3]  120.14,94.87 180 bottom
SJ71  [SJ_3]  109.98,94.87 180 bottom
SJ72  [SJ_3]  115.06,94.87 180 bottom
STANDOFF1  STAND-OFF  [STAND-OFF]  9.4,19.56 0 top
STANDOFF2  STAND-OFF  [STAND-OFF]  37.34,19.56 0 top
STANDOFF3  STAND-OFF  [STAND-OFF]  42.93,19.56 0 top
STANDOFF4  STAND-OFF  [STAND-OFF]  70.87,19.56 0 top
STANDOFF5  STAND-OFF  [STAND-OFF]  76.45,19.56 0 top
STANDOFF6  STAND-OFF  [STAND-OFF]  104.39,19.56 0 top
STANDOFF7  STAND-OFF  [STAND-OFF]  109.98,19.56 0 top
STANDOFF8  STAND-OFF  [STAND-OFF]  137.92,19.56 0 top
STANDOFF9  STAND-OFF  [STAND-OFF]  9.4,35.31 0 top
STANDOFF10  STAND-OFF  [STAND-OFF]  37.34,35.31 0 top
STANDOFF11  STAND-OFF  [STAND-OFF]  42.93,35.31 0 top
STANDOFF12  STAND-OFF  [STAND-OFF]  70.87,35.31 0 top
STANDOFF13  STAND-OFF  [STAND-OFF]  76.45,35.31 0 top
STANDOFF14  STAND-OFF  [STAND-OFF]  104.39,35.31 0 top
STANDOFF15  STAND-OFF  [STAND-OFF]  109.98,35.31 0 top
STANDOFF16  STAND-OFF  [STAND-OFF]  137.92,35.31 0 top
STANDOFF17  STAND-OFF  [STAND-OFF]  9.4,51.05 0 top
STANDOFF18  STAND-OFF  [STAND-OFF]  37.34,51.05 0 top
STANDOFF19  STAND-OFF  [STAND-OFF]  42.93,51.05 0 top
STANDOFF20  STAND-OFF  [STAND-OFF]  70.87,51.05 0 top
STANDOFF21  STAND-OFF  [STAND-OFF]  76.45,51.05 0 top
STANDOFF22  STAND-OFF  [STAND-OFF]  104.39,51.05 0 top
STANDOFF23  STAND-OFF  [STAND-OFF]  109.98,51.05 0 top
STANDOFF24  STAND-OFF  [STAND-OFF]  137.92,51.05 0 top
STANDOFF25  STAND-OFF  [STAND-OFF]  9.4,66.8 0 top
STANDOFF26  STAND-OFF  [STAND-OFF]  37.34,66.8 0 top
STANDOFF27  STAND-OFF  [STAND-OFF]  42.93,66.8 0 top
STANDOFF28  STAND-OFF  [STAND-OFF]  70.87,66.8 0 top
STANDOFF29  STAND-OFF  [STAND-OFF]  76.45,66.8 0 top
STANDOFF30  STAND-OFF  [STAND-OFF]  104.39,66.8 0 top
STANDOFF31  STAND-OFF  [STAND-OFF]  109.98,66.8 0 top
STANDOFF32  STAND-OFF  [STAND-OFF]  137.92,66.8 0 top
STANDOFF33  STAND-OFF  [STAND-OFF]  9.4,82.55 0 top
STANDOFF34  STAND-OFF  [STAND-OFF]  37.34,82.55 0 top
STANDOFF35  STAND-OFF  [STAND-OFF]  42.93,82.55 0 top
STANDOFF36  STAND-OFF  [STAND-OFF]  70.87,82.55 0 top
STANDOFF37  STAND-OFF  [STAND-OFF]  76.45,82.55 0 top
STANDOFF38  STAND-OFF  [STAND-OFF]  104.39,82.55 0 top
STANDOFF39  STAND-OFF  [STAND-OFF]  109.98,82.55 0 top
STANDOFF40  STAND-OFF  [STAND-OFF]  137.92,82.55 0 top
STANDOFF41  STAND-OFF  [STAND-OFF]  9.4,98.3 0 top
STANDOFF42  STAND-OFF  [STAND-OFF]  37.34,98.3 0 top
STANDOFF43  STAND-OFF  [STAND-OFF]  42.93,98.3 0 top
STANDOFF44  STAND-OFF  [STAND-OFF]  70.87,98.3 0 top
STANDOFF45  STAND-OFF  [STAND-OFF]  76.45,98.3 0 top
STANDOFF46  STAND-OFF  [STAND-OFF]  104.39,98.3 0 top
STANDOFF47  STAND-OFF  [STAND-OFF]  109.98,98.3 0 top
STANDOFF48  STAND-OFF  [STAND-OFF]  137.92,98.3 0 top
U1  LSM9DS0  [LGA-24]  23.37,14.48 90 top
U2  LSM9DS0  [LGA-24]  56.9,14.48 90 top
U3  LSM9DS0  [LGA-24]  90.42,14.48 90 top
U4  LSM9DS0  [LGA-24]  123.95,14.48 90 top
U5  LSM9DS0  [LGA-24]  23.37,30.23 90 top
U6  LSM9DS0  [LGA-24]  56.9,30.23 90 top
U7  LSM9DS0  [LGA-24]  90.42,30.23 90 top
U8  LSM9DS0  [LGA-24]  123.95,30.23 90 top
U9  LSM9DS0  [LGA-24]  23.37,45.97 90 top
U10  LSM9DS0  [LGA-24]  56.9,45.97 90 top
U11  LSM9DS0  [LGA-24]  90.42,45.97 90 top
U12  LSM9DS0  [LGA-24]  123.95,45.97 90 top
U13  LSM9DS0  [LGA-24]  23.37,61.72 90 top
U14  LSM9DS0  [LGA-24]  56.9,61.72 90 top
U15  LSM9DS0  [LGA-24]  90.42,61.72 90 top
U16  LSM9DS0  [LGA-24]  123.95,61.72 90 top
U17  LSM9DS0  [LGA-24]  23.37,77.47 90 top
U18  LSM9DS0  [LGA-24]  56.9,77.47 90 top
U19  LSM9DS0  [LGA-24]  90.42,77.47 90 top
U20  LSM9DS0  [LGA-24]  123.95,77.47 90 top
U21  LSM9DS0  [LGA-24]  23.37,93.22 90 top
U22  LSM9DS0  [LGA-24]  56.9,93.22 90 top
U23  LSM9DS0  [LGA-24]  90.42,93.22 90 top
U24  LSM9DS0  [LGA-24]  123.95,93.22 90 top

## Library data of the parts
C1 C6 C10 C14 C18 C22 C26 C30 C34 C38 C42 C46 C50 C54 C58 C62 C66 C70 C74 C78 C82 C86 C90 C94 = SparkFun-Capacitors; PROD_ID: CAP-08280
C2 C5 C9 C13 C17 C21 C25 C29 C33 C37 C41 C45 C49 C53 C57 C61 C65 C69 C73 C77 C81 C85 C89 C93 = SparkFun-Capacitors; PROD_ID: CAP-07822
C3 C8 C12 C16 C20 C24 C28 C32 C36 C40 C44 C48 C52 C56 C60 C64 C68 C72 C76 C80 C84 C88 C92 C96 = SparkFun-Capacitors; PROD_ID: CAP-00811
C4 C7 C11 C15 C19 C23 C27 C31 C35 C39 C43 C47 C51 C55 C59 C63 C67 C71 C75 C79 C83 C87 C91 C95 = SparkFun-Capacitors; PROD_ID: CAP-00868
E$1 E$4 E$5 FID1-FID48 LOGO1-LOGO72 = SparkFun-Aesthetics
JP1-JP24 = SparkFun-Connectors
R1-R144 = SparkFun-Resistors; PROD_ID: RES-00824
SJ1-SJ72 = SparkFun-Passives
STANDOFF1-STANDOFF48 = SparkFun-Electromechanical
U1-U24 = SparkFun-DigitalIC

## Nets
CS_G: JP1.13 R3.1 U1.19
CS_G1: JP2.13 R9.1 U2.19
CS_G2: JP3.13 R15.1 U3.19
CS_G3: JP4.13 R21.1 U4.19
CS_G4: JP5.13 R27.1 U5.19
CS_G5: JP6.13 R33.1 U6.19
CS_G6: JP7.13 R39.1 U7.19
CS_G7: JP8.13 R45.1 U8.19
CS_G8: JP9.13 R51.1 U9.19
CS_G9: JP10.13 R57.1 U10.19
CS_G10: JP11.13 R63.1 U11.19
CS_G11: JP12.13 R69.1 U12.19
CS_G12: JP13.13 R75.1 U13.19
CS_G13: JP14.13 R81.1 U14.19
CS_G14: JP15.13 R87.1 U15.19
CS_G15: JP16.13 R93.1 U16.19
CS_G16: JP17.13 R99.1 U17.19
CS_G17: JP18.13 R105.1 U18.19
CS_G18: JP19.13 R111.1 U19.19
CS_G19: JP20.13 R117.1 U20.19
CS_G20: JP21.13 R123.1 U21.19
CS_G21: JP22.13 R129.1 U22.19
CS_G22: JP23.13 R135.1 U23.19
CS_G23: JP24.13 R141.1 U24.19
CS_XM: JP1.12 R4.1 U1.20
CS_XM1: JP2.12 R10.1 U2.20
CS_XM2: JP3.12 R16.1 U3.20
CS_XM3: JP4.12 R22.1 U4.20
CS_XM4: JP5.12 R28.1 U5.20
CS_XM5: JP6.12 R34.1 U6.20
CS_XM6: JP7.12 R40.1 U7.20
CS_XM7: JP8.12 R46.1 U8.20
CS_XM8: JP9.12 R52.1 U9.20
CS_XM9: JP10.12 R58.1 U10.20
CS_XM10: JP11.12 R64.1 U11.20
CS_XM11: JP12.12 R70.1 U12.20
CS_XM12: JP13.12 R76.1 U13.20
CS_XM13: JP14.12 R82.1 U14.20
CS_XM14: JP15.12 R88.1 U15.20
CS_XM15: JP16.12 R94.1 U16.20
CS_XM16: JP17.12 R100.1 U17.20
CS_XM17: JP18.12 R106.1 U18.20
CS_XM18: JP19.12 R112.1 U19.20
CS_XM19: JP20.12 R118.1 U20.20
CS_XM20: JP21.12 R124.1 U21.20
CS_XM21: JP22.12 R130.1 U22.20
CS_XM22: JP23.12 R136.1 U23.20
CS_XM23: JP24.12 R142.1 U24.20
DEN_G: JP1.5 U1.10
DEN_G1: JP2.5 U2.10
DEN_G2: JP3.5 U3.10
DEN_G3: JP4.5 U4.10
DEN_G4: JP5.5 U5.10
DEN_G5: JP6.5 U6.10
DEN_G6: JP7.5 U7.10
DEN_G7: JP8.5 U8.10
DEN_G8: JP9.5 U9.10
DEN_G9: JP10.5 U10.10
DEN_G10: JP11.5 U11.10
DEN_G11: JP12.5 U12.10
DEN_G12: JP13.5 U13.10
DEN_G13: JP14.5 U14.10
DEN_G14: JP15.5 U15.10
DEN_G15: JP16.5 U16.10
DEN_G16: JP17.5 U17.10
DEN_G17: JP18.5 U18.10
DEN_G18: JP19.5 U19.10
DEN_G19: JP20.5 U20.10
DEN_G20: JP21.5 U21.10
DEN_G21: JP22.5 U22.10
DEN_G22: JP23.5 U23.10
DEN_G23: JP24.5 U24.10
DRDY_G: JP1.3 U1.12
DRDY_G1: JP2.3 U2.12
DRDY_G2: JP3.3 U3.12
DRDY_G3: JP4.3 U4.12
DRDY_G4: JP5.3 U5.12
DRDY_G5: JP6.3 U6.12
DRDY_G6: JP7.3 U7.12
DRDY_G7: JP8.3 U8.12
DRDY_G8: JP9.3 U9.12
DRDY_G9: JP10.3 U10.12
DRDY_G10: JP11.3 U11.12
DRDY_G11: JP12.3 U12.12
DRDY_G12: JP13.3 U13.12
DRDY_G13: JP14.3 U14.12
DRDY_G14: JP15.3 U15.12
DRDY_G15: JP16.3 U16.12
DRDY_G16: JP17.3 U17.12
DRDY_G17: JP18.3 U18.12
DRDY_G18: JP19.3 U19.12
DRDY_G19: JP20.3 U20.12
DRDY_G20: JP21.3 U21.12
DRDY_G21: JP22.3 U22.12
DRDY_G22: JP23.3 U23.12
DRDY_G23: JP24.3 U24.12
GND: C1.2 C3.C C4.2 JP1.6 U1.2 U1.3 U1.4 U1.5 U1.6
GND1: C6.2 C7.2 C8.C JP2.6 U2.2 U2.3 U2.4 U2.5 U2.6
GND2: C10.2 C11.2 C12.C JP3.6 U3.2 U3.3 U3.4 U3.5 U3.6
GND3: C14.2 C15.2 C16.C JP4.6 U4.2 U4.3 U4.4 U4.5 U4.6
GND4: C18.2 C19.2 C20.C JP5.6 U5.2 U5.3 U5.4 U5.5 U5.6
GND5: C22.2 C23.2 C24.C JP6.6 U6.2 U6.3 U6.4 U6.5 U6.6
GND6: C26.2 C27.2 C28.C JP7.6 U7.2 U7.3 U7.4 U7.5 U7.6
GND7: C30.2 C31.2 C32.C JP8.6 U8.2 U8.3 U8.4 U8.5 U8.6
GND8: C34.2 C35.2 C36.C JP9.6 U9.2 U9.3 U9.4 U9.5 U9.6
GND9: C38.2 C39.2 C40.C JP10.6 U10.2 U10.3 U10.4 U10.5 U10.6
GND10: C42.2 C43.2 C44.C JP11.6 U11.2 U11.3 U11.4 U11.5 U11.6
GND11: C46.2 C47.2 C48.C JP12.6 U12.2 U12.3 U12.4 U12.5 U12.6
GND12: C50.2 C51.2 C52.C JP13.6 U13.2 U13.3 U13.4 U13.5 U13.6
GND13: C54.2 C55.2 C56.C JP14.6 U14.2 U14.3 U14.4 U14.5 U14.6
GND14: C58.2 C59.2 C60.C JP15.6 U15.2 U15.3 U15.4 U15.5 U15.6
GND15: C62.2 C63.2 C64.C JP16.6 U16.2 U16.3 U16.4 U16.5 U16.6
GND16: C66.2 C67.2 C68.C JP17.6 U17.2 U17.3 U17.4 U17.5 U17.6
GND17: C70.2 C71.2 C72.C JP18.6 U18.2 U18.3 U18.4 U18.5 U18.6
GND18: C74.2 C75.2 C76.C JP19.6 U19.2 U19.3 U19.4 U19.5 U19.6
GND19: C78.2 C79.2 C80.C JP20.6 U20.2 U20.3 U20.4 U20.5 U20.6
GND20: C82.2 C83.2 C84.C JP21.6 U21.2 U21.3 U21.4 U21.5 U21.6
GND21: C86.2 C87.2 C88.C JP22.6 U22.2 U22.3 U22.4 U22.5 U22.6
GND22: C90.2 C91.2 C92.C JP23.6 U23.2 U23.3 U23.4 U23.5 U23.6
GND23: C94.2 C95.2 C96.C JP24.6 U24.2 U24.3 U24.4 U24.5 U24.6
INT1_XM: JP1.2 U1.13
INT1_XM1: JP2.2 U2.13
INT1_XM2: JP3.2 U3.13
INT1_XM3: JP4.2 U4.13
INT1_XM4: JP5.2 U5.13
INT1_XM5: JP6.2 U6.13
INT1_XM6: JP7.2 U7.13
INT1_XM7: JP8.2 U8.13
INT1_XM8: JP9.2 U9.13
INT1_XM9: JP10.2 U10.13
INT1_XM10: JP11.2 U11.13
INT1_XM11: JP12.2 U12.13
INT1_XM12: JP13.2 U13.13
INT1_XM13: JP14.2 U14.13
INT1_XM14: JP15.2 U15.13
INT1_XM15: JP16.2 U16.13
INT1_XM16: JP17.2 U17.13
INT1_XM17: JP18.2 U18.13
INT1_XM18: JP19.2 U19.13
INT1_XM19: JP20.2 U20.13
INT1_XM20: JP21.2 U21.13
INT1_XM21: JP22.2 U22.13
INT1_XM22: JP23.2 U23.13
INT1_XM23: JP24.2 U24.13
INT2_XM: JP1.1 U1.14
INT2_XM1: JP2.1 U2.14
INT2_XM2: JP3.1 U3.14
INT2_XM3: JP4.1 U4.14
INT2_XM4: JP5.1 U5.14
INT2_XM5: JP6.1 U6.14
INT2_XM6: JP7.1 U7.14
INT2_XM7: JP8.1 U8.14
INT2_XM8: JP9.1 U9.14
INT2_XM9: JP10.1 U10.14
INT2_XM10: JP11.1 U11.14
INT2_XM11: JP12.1 U12.14
INT2_XM12: JP13.1 U13.14
INT2_XM13: JP14.1 U14.14
INT2_XM14: JP15.1 U15.14
INT2_XM15: JP16.1 U16.14
INT2_XM16: JP17.1 U17.14
INT2_XM17: JP18.1 U18.14
INT2_XM18: JP19.1 U19.14
INT2_XM19: JP20.1 U20.14
INT2_XM20: JP21.1 U21.14
INT2_XM21: JP22.1 U22.14
INT2_XM22: JP23.1 U23.14
INT2_XM23: JP24.1 U24.14
INT_G: JP1.4 U1.11
INT_G1: JP2.4 U2.11
INT_G2: JP3.4 U3.11
INT_G3: JP4.4 U4.11
INT_G4: JP5.4 U5.11
INT_G5: JP6.4 U6.11
INT_G6: JP7.4 U7.11
INT_G7: JP8.4 U8.11
INT_G8: JP9.4 U9.11
INT_G9: JP10.4 U10.11
INT_G10: JP11.4 U11.11
INT_G11: JP12.4 U12.11
INT_G12: JP13.4 U13.11
INT_G13: JP14.4 U14.11
INT_G14: JP15.4 U15.11
INT_G15: JP16.4 U16.11
INT_G16: JP17.4 U17.11
INT_G17: JP18.4 U18.11
INT_G18: JP19.4 U19.11
INT_G19: JP20.4 U20.11
INT_G20: JP21.4 U21.11
INT_G21: JP22.4 U22.11
INT_G22: JP23.4 U23.11
INT_G23: JP24.4 U24.11
N$1: C2.1 U1.9
N$2: C2.2 U1.8
N$3: C1.1 U1.7
N$4: R3.2 SJ2.1
N$5: R4.2 SJ2.3
N$6: R1.2 SJ1.3
N$7: R2.2 SJ1.1
N$12: R5.2 SJ3.3
N$13: R6.2 SJ3.1
N$16: C5.1 U2.9
N$17: C5.2 U2.8
N$18: C6.1 U2.7
N$19: R7.2 SJ4.3
N$20: R8.2 SJ4.1
N$21: R9.2 SJ5.1
N$22: R10.2 SJ5.3
N$23: R11.2 SJ6.3
N$24: R12.2 SJ6.1
N$31: C9.1 U3.9
N$32: C9.2 U3.8
N$33: C10.1 U3.7
N$34: R13.2 SJ7.3
N$35: R14.2 SJ7.1
N$36: R15.2 SJ8.1
N$37: R16.2 SJ8.3
N$38: R17.2 SJ9.3
N$39: R18.2 SJ9.1
N$46: C13.1 U4.9
N$47: C13.2 U4.8
N$48: C14.1 U4.7
N$49: R19.2 SJ10.3
N$50: R20.2 SJ10.1
N$51: R21.2 SJ11.1
N$52: R22.2 SJ11.3
N$53: R23.2 SJ12.3
N$54: R24.2 SJ12.1
N$61: C17.1 U5.9
N$62: C17.2 U5.8
N$63: C18.1 U5.7
N$64: R25.2 SJ13.3
N$65: R26.2 SJ13.1
N$66: R27.2 SJ14.1
N$67: R28.2 SJ14.3
N$68: R29.2 SJ15.3
N$69: R30.2 SJ15.1
N$76: C21.1 U6.9
N$77: C21.2 U6.8
N$78: C22.1 U6.7
N$79: R31.2 SJ16.3
N$80: R32.2 SJ16.1
N$81: R33.2 SJ17.1
N$82: R34.2 SJ17.3
N$83: R35.2 SJ18.3
N$84: R36.2 SJ18.1
N$91: C25.1 U7.9
N$92: C25.2 U7.8
N$93: C26.1 U7.7
N$94: R37.2 SJ19.3
N$95: R38.2 SJ19.1
N$96: R39.2 SJ20.1
N$97: R40.2 SJ20.3
N$98: R41.2 SJ21.3
N$99: R42.2 SJ21.1
N$106: C29.1 U8.9
N$107: C29.2 U8.8
N$108: C30.1 U8.7
N$109: R43.2 SJ22.3
N$110: R44.2 SJ22.1
N$111: R45.2 SJ23.1
N$112: R46.2 SJ23.3
N$113: R47.2 SJ24.3
N$114: R48.2 SJ24.1
N$121: C33.1 U9.9
N$122: C33.2 U9.8
N$123: C34.1 U9.7
N$124: R49.2 SJ25.3
N$125: R50.2 SJ25.1
N$126: R51.2 SJ26.1
N$127: R52.2 SJ26.3
N$128: R53.2 SJ27.3
N$129: R54.2 SJ27.1
N$136: C37.1 U10.9
N$137: C37.2 U10.8
N$138: C38.1 U10.7
N$139: R55.2 SJ28.3
N$140: R56.2 SJ28.1
N$141: R57.2 SJ29.1
N$142: R58.2 SJ29.3
N$143: R59.2 SJ30.3
N$144: R60.2 SJ30.1
N$151: C41.1 U11.9
N$152: C41.2 U11.8
N$153: C42.1 U11.7
N$154: R61.2 SJ31.3
N$155: R62.2 SJ31.1
N$156: R63.2 SJ32.1
N$157: R64.2 SJ32.3
N$158: R65.2 SJ33.3
N$159: R66.2 SJ33.1
N$166: C45.1 U12.9
N$167: C45.2 U12.8
N$168: C46.1 U12.7
N$169: R67.2 SJ34.3
N$170: R68.2 SJ34.1
N$171: R69.2 SJ35.1
N$172: R70.2 SJ35.3
N$173: R71.2 SJ36.3
N$174: R72.2 SJ36.1
N$181: C49.1 U13.9
N$182: C49.2 U13.8
N$183: C50.1 U13.7
N$184: R73.2 SJ37.3
N$185: R74.2 SJ37.1
N$186: R75.2 SJ38.1
N$187: R76.2 SJ38.3
N$188: R77.2 SJ39.3
N$189: R78.2 SJ39.1
N$196: C53.1 U14.9
N$197: C53.2 U14.8
N$198: C54.1 U14.7
N$199: R79.2 SJ40.3
N$200: R80.2 SJ40.1
N$201: R81.2 SJ41.1
N$202: R82.2 SJ41.3
N$203: R83.2 SJ42.3
N$204: R84.2 SJ42.1
N$211: C57.1 U15.9
N$212: C57.2 U15.8
N$213: C58.1 U15.7
N$214: R85.2 SJ43.3
N$215: R86.2 SJ43.1
N$216: R87.2 SJ44.1
N$217: R88.2 SJ44.3
N$218: R89.2 SJ45.3
N$219: R90.2 SJ45.1
N$226: C61.1 U16.9
N$227: C61.2 U16.8
N$228: C62.1 U16.7
N$229: R91.2 SJ46.3
N$230: R92.2 SJ46.1
N$231: R93.2 SJ47.1
N$232: R94.2 SJ47.3
N$233: R95.2 SJ48.3
N$234: R96.2 SJ48.1
N$241: C65.1 U17.9
N$242: C65.2 U17.8
N$243: C66.1 U17.7
N$244: R97.2 SJ49.3
N$245: R98.2 SJ49.1
N$246: R99.2 SJ50.1
N$247: R100.2 SJ50.3
N$248: R101.2 SJ51.3
N$249: R102.2 SJ51.1
N$256: C69.1 U18.9
N$257: C69.2 U18.8
N$258: C70.1 U18.7
N$259: R103.2 SJ52.3
N$260: R104.2 SJ52.1
N$261: R105.2 SJ53.1
N$262: R106.2 SJ53.3
N$263: R107.2 SJ54.3
N$264: R108.2 SJ54.1
N$271: C73.1 U19.9
N$272: C73.2 U19.8
N$273: C74.1 U19.7
N$274: R109.2 SJ55.3
N$275: R110.2 SJ55.1
N$276: R111.2 SJ56.1
N$277: R112.2 SJ56.3
N$278: R113.2 SJ57.3
N$279: R114.2 SJ57.1
N$286: C77.1 U20.9
N$287: C77.2 U20.8
N$288: C78.1 U20.7
N$289: R115.2 SJ58.3
N$290: R116.2 SJ58.1
N$291: R117.2 SJ59.1
N$292: R118.2 SJ59.3
N$293: R119.2 SJ60.3
N$294: R120.2 SJ60.1
N$301: C81.1 U21.9
N$302: C81.2 U21.8
N$303: C82.1 U21.7
N$304: R121.2 SJ61.3
N$305: R122.2 SJ61.1
N$306: R123.2 SJ62.1
N$307: R124.2 SJ62.3
N$308: R125.2 SJ63.3
N$309: R126.2 SJ63.1
N$316: C85.1 U22.9
N$317: C85.2 U22.8
N$318: C86.1 U22.7
N$319: R127.2 SJ64.3
N$320: R128.2 SJ64.1
N$321: R129.2 SJ65.1
N$322: R130.2 SJ65.3
N$323: R131.2 SJ66.3
N$324: R132.2 SJ66.1
N$331: C89.1 U23.9
N$332: C89.2 U23.8
N$333: C90.1 U23.7
N$334: R133.2 SJ67.3
N$335: R134.2 SJ67.1
N$336: R135.2 SJ68.1
N$337: R136.2 SJ68.3
N$338: R137.2 SJ69.3
N$339: R138.2 SJ69.1
N$346: C93.1 U24.9
N$347: C93.2 U24.8
N$348: C94.1 U24.7
N$349: R139.2 SJ70.3
N$350: R140.2 SJ70.1
N$351: R141.2 SJ71.1
N$352: R142.2 SJ71.3
N$353: R143.2 SJ72.3
N$354: R144.2 SJ72.1
SCL: JP1.9 R2.1 U1.21
SCL1: JP2.9 R8.1 U2.21
SCL2: JP3.9 R14.1 U3.21
SCL3: JP4.9 R20.1 U4.21
SCL4: JP5.9 R26.1 U5.21
SCL5: JP6.9 R32.1 U6.21
SCL6: JP7.9 R38.1 U7.21
SCL7: JP8.9 R44.1 U8.21
SCL8: JP9.9 R50.1 U9.21
SCL9: JP10.9 R56.1 U10.21
SCL10: JP11.9 R62.1 U11.21
SCL11: JP12.9 R68.1 U12.21
SCL12: JP13.9 R74.1 U13.21
SCL13: JP14.9 R80.1 U14.21
SCL14: JP15.9 R86.1 U15.21
SCL15: JP16.9 R92.1 U16.21
SCL16: JP17.9 R98.1 U17.21
SCL17: JP18.9 R104.1 U18.21
SCL18: JP19.9 R110.1 U19.21
SCL19: JP20.9 R116.1 U20.21
SCL20: JP21.9 R122.1 U21.21
SCL21: JP22.9 R128.1 U22.21
SCL22: JP23.9 R134.1 U23.21
SCL23: JP24.9 R140.1 U24.21
SDA: JP1.8 R1.1 U1.24
SDA1: JP2.8 R7.1 U2.24
SDA2: JP3.8 R13.1 U3.24
SDA3: JP4.8 R19.1 U4.24
SDA4: JP5.8 R25.1 U5.24
SDA5: JP6.8 R31.1 U6.24
SDA6: JP7.8 R37.1 U7.24
SDA7: JP8.8 R43.1 U8.24
SDA8: JP9.8 R49.1 U9.24
SDA9: JP10.8 R55.1 U10.24
SDA10: JP11.8 R61.1 U11.24
SDA11: JP12.8 R67.1 U12.24
SDA12: JP13.8 R73.1 U13.24
SDA13: JP14.8 R79.1 U14.24
SDA14: JP15.8 R85.1 U15.24
SDA15: JP16.8 R91.1 U16.24
SDA16: JP17.8 R97.1 U17.24
SDA17: JP18.8 R103.1 U18.24
SDA18: JP19.8 R109.1 U19.24
SDA19: JP20.8 R115.1 U20.24
SDA20: JP21.8 R121.1 U21.24
SDA21: JP22.8 R127.1 U22.24
SDA22: JP23.8 R133.1 U23.24
SDA23: JP24.8 R139.1 U24.24
SDO_G: JP1.11 R6.1 U1.22
SDO_G1: JP2.11 R12.1 U2.22
SDO_G2: JP3.11 R18.1 U3.22
SDO_G3: JP4.11 R24.1 U4.22
SDO_G4: JP5.11 R30.1 U5.22
SDO_G5: JP6.11 R36.1 U6.22
SDO_G6: JP7.11 R42.1 U7.22
SDO_G7: JP8.11 R48.1 U8.22
SDO_G8: JP9.11 R54.1 U9.22
SDO_G9: JP10.11 R60.1 U10.22
SDO_G10: JP11.11 R66.1 U11.22
SDO_G11: JP12.11 R72.1 U12.22
SDO_G12: JP13.11 R78.1 U13.22
SDO_G13: JP14.11 R84.1 U14.22
SDO_G14: JP15.11 R90.1 U15.22
SDO_G15: JP16.11 R96.1 U16.22
SDO_G16: JP17.11 R102.1 U17.22
SDO_G17: JP18.11 R108.1 U18.22
SDO_G18: JP19.11 R114.1 U19.22
SDO_G19: JP20.11 R120.1 U20.22
SDO_G20: JP21.11 R126.1 U21.22
SDO_G21: JP22.11 R132.1 U22.22
SDO_G22: JP23.11 R138.1 U23.22
SDO_G23: JP24.11 R144.1 U24.22
SDO_XM: JP1.10 R5.1 U1.23
SDO_XM1: JP2.10 R11.1 U2.23
SDO_XM2: JP3.10 R17.1 U3.23
SDO_XM3: JP4.10 R23.1 U4.23
SDO_XM4: JP5.10 R29.1 U5.23
SDO_XM5: JP6.10 R35.1 U6.23
SDO_XM6: JP7.10 R41.1 U7.23
SDO_XM7: JP8.10 R47.1 U8.23
SDO_XM8: JP9.10 R53.1 U9.23
SDO_XM9: JP10.10 R59.1 U10.23
SDO_XM10: JP11.10 R65.1 U11.23
SDO_XM11: JP12.10 R71.1 U12.23
SDO_XM12: JP13.10 R77.1 U13.23
SDO_XM13: JP14.10 R83.1 U14.23
SDO_XM14: JP15.10 R89.1 U15.23
SDO_XM15: JP16.10 R95.1 U16.23
SDO_XM16: JP17.10 R101.1 U17.23
SDO_XM17: JP18.10 R107.1 U18.23
SDO_XM18: JP19.10 R113.1 U19.23
SDO_XM19: JP20.10 R119.1 U20.23
SDO_XM20: JP21.10 R125.1 U21.23
SDO_XM21: JP22.10 R131.1 U22.23
SDO_XM22: JP23.10 R137.1 U23.23
SDO_XM23: JP24.10 R143.1 U24.23
VCC: C3.A C4.1 JP1.7 SJ1.2 SJ2.2 SJ3.2 U1.15 U1.16 U1.17 U1.18
VCC1: C7.1 C8.A JP2.7 SJ4.2 SJ5.2 SJ6.2 U2.15 U2.16 U2.17 U2.18
VCC2: C11.1 C12.A JP3.7 SJ7.2 SJ8.2 SJ9.2 U3.15 U3.16 U3.17 U3.18
VCC3: C15.1 C16.A JP4.7 SJ10.2 SJ11.2 SJ12.2 U4.15 U4.16 U4.17 U4.18
VCC4: C19.1 C20.A JP5.7 SJ13.2 SJ14.2 SJ15.2 U5.15 U5.16 U5.17 U5.18
VCC5: C23.1 C24.A JP6.7 SJ16.2 SJ17.2 SJ18.2 U6.15 U6.16 U6.17 U6.18
VCC6: C27.1 C28.A JP7.7 SJ19.2 SJ20.2 SJ21.2 U7.15 U7.16 U7.17 U7.18
VCC7: C31.1 C32.A JP8.7 SJ22.2 SJ23.2 SJ24.2 U8.15 U8.16 U8.17 U8.18
VCC8: C35.1 C36.A JP9.7 SJ25.2 SJ26.2 SJ27.2 U9.15 U9.16 U9.17 U9.18
VCC9: C39.1 C40.A JP10.7 SJ28.2 SJ29.2 SJ30.2 U10.15 U10.16 U10.17 U10.18
VCC10: C43.1 C44.A JP11.7 SJ31.2 SJ32.2 SJ33.2 U11.15 U11.16 U11.17 U11.18
VCC11: C47.1 C48.A JP12.7 SJ34.2 SJ35.2 SJ36.2 U12.15 U12.16 U12.17 U12.18
VCC12: C51.1 C52.A JP13.7 SJ37.2 SJ38.2 SJ39.2 U13.15 U13.16 U13.17 U13.18
VCC13: C55.1 C56.A JP14.7 SJ40.2 SJ41.2 SJ42.2 U14.15 U14.16 U14.17 U14.18
VCC14: C59.1 C60.A JP15.7 SJ43.2 SJ44.2 SJ45.2 U15.15 U15.16 U15.17 U15.18
VCC15: C63.1 C64.A JP16.7 SJ46.2 SJ47.2 SJ48.2 U16.15 U16.16 U16.17 U16.18
VCC16: C67.1 C68.A JP17.7 SJ49.2 SJ50.2 SJ51.2 U17.15 U17.16 U17.17 U17.18
VCC17: C71.1 C72.A JP18.7 SJ52.2 SJ53.2 SJ54.2 U18.15 U18.16 U18.17 U18.18
VCC18: C75.1 C76.A JP19.7 SJ55.2 SJ56.2 SJ57.2 U19.15 U19.16 U19.17 U19.18
VCC19: C79.1 C80.A JP20.7 SJ58.2 SJ59.2 SJ60.2 U20.15 U20.16 U20.17 U20.18
VCC20: C83.1 C84.A JP21.7 SJ61.2 SJ62.2 SJ63.2 U21.15 U21.16 U21.17 U21.18
VCC21: C87.1 C88.A JP22.7 SJ64.2 SJ65.2 SJ66.2 U22.15 U22.16 U22.17 U22.18
VCC22: C91.1 C92.A JP23.7 SJ67.2 SJ68.2 SJ69.2 U23.15 U23.16 U23.17 U23.18
VCC23: C95.1 C96.A JP24.7 SJ70.2 SJ71.2 SJ72.2 U24.15 U24.16 U24.17 U24.18

## Tracks (layer width: path | path; a pad name or v marks a point on that pad's centre or on a via)
CS_G
  Top 0.254: JP1.13 8.13,14.48 8.98,15.33 R3.1 9.27,15.88 10.67,17.27 19.65,17.27 21.19,15.73 U1.19
CS_G1
  Top 0.254: JP2.13 41.66,14.48 42.51,15.33 R9.1 42.8,15.88 44.2,17.27 53.17,17.27 54.72,15.73 U2.19
CS_G2
  Top 0.254: JP3.13 75.18,14.48 76.03,15.33 R15.1 76.33,15.88 77.72,17.27 86.7,17.27 88.25,15.73 U3.19
CS_G3
  Top 0.254: JP4.13 108.71,14.48 109.56,15.33 R21.1 109.86,15.88 111.25,17.27 120.23,17.27 121.78,15.73 U4.19
CS_G4
  Top 0.254: JP5.13 8.13,30.23 8.98,31.08 R27.1 9.27,31.62 10.67,33.02 19.65,33.02 21.19,31.48 U5.19
CS_G5
  Top 0.254: JP6.13 41.66,30.23 42.51,31.08 R33.1 42.8,31.62 44.2,33.02 53.17,33.02 54.72,31.48 U6.19
CS_G6
  Top 0.254: JP7.13 75.18,30.23 76.03,31.08 R39.1 76.33,31.62 77.72,33.02 86.7,33.02 88.25,31.48 U7.19
CS_G7
  Top 0.254: JP8.13 108.71,30.23 109.56,31.08 R45.1 109.86,31.62 111.25,33.02 120.23,33.02 121.78,31.48 U8.19
CS_G8
  Top 0.254: JP9.13 8.13,45.97 8.98,46.82 R51.1 9.27,47.37 10.67,48.77 19.65,48.77 21.19,47.22 U9.19
CS_G9
  Top 0.254: JP10.13 41.66,45.97 42.51,46.82 R57.1 42.8,47.37 44.2,48.77 53.17,48.77 54.72,47.22 U10.19
CS_G10
  Top 0.254: JP11.13 75.18,45.97 76.03,46.82 R63.1 76.33,47.37 77.72,48.77 86.7,48.77 88.25,47.22 U11.19
CS_G11
  Top 0.254: JP12.13 108.71,45.97 109.56,46.82 R69.1 109.86,47.37 111.25,48.77 120.23,48.77 121.78,47.22 U12.19
CS_G12
  Top 0.254: JP13.13 8.13,61.72 8.98,62.57 R75.1 9.27,63.12 10.67,64.52 19.65,64.52 21.19,62.97 U13.19
CS_G13
  Top 0.254: JP14.13 41.66,61.72 42.51,62.57 R81.1 42.8,63.12 44.2,64.52 53.17,64.52 54.72,62.97 U14.19
CS_G14
  Top 0.254: JP15.13 75.18,61.72 76.03,62.57 R87.1 76.33,63.12 77.72,64.52 86.7,64.52 88.25,62.97 U15.19
CS_G15
  Top 0.254: JP16.13 108.71,61.72 109.56,62.57 R93.1 109.86,63.12 111.25,64.52 120.23,64.52 121.78,62.97 U16.19
CS_G16
  Top 0.254: JP17.13 8.13,77.47 8.98,78.32 R99.1 9.27,78.87 10.67,80.26 19.65,80.26 21.19,78.72 U17.19
CS_G17
  Top 0.254: JP18.13 41.66,77.47 42.51,78.32 R105.1 42.8,78.87 44.2,80.26 53.17,80.26 54.72,78.72 U18.19
CS_G18
  Top 0.254: JP19.13 75.18,77.47 76.03,78.32 R111.1 76.33,78.87 77.72,80.26 86.7,80.26 88.25,78.72 U19.19
CS_G19
  Top 0.254: JP20.13 108.71,77.47 109.56,78.32 R117.1 109.86,78.87 111.25,80.26 120.23,80.26 121.78,78.72 U20.19
CS_G20
  Top 0.254: JP21.13 8.13,93.22 8.98,94.07 R123.1 9.27,94.61 10.67,96.01 19.65,96.01 21.19,94.47 U21.19
CS_G21
  Top 0.254: JP22.13 41.66,93.22 42.51,94.07 R129.1 42.8,94.61 44.2,96.01 53.17,96.01 54.72,94.47 U22.19
CS_G22
  Top 0.254: JP23.13 75.18,93.22 76.03,94.07 R135.1 76.33,94.61 77.72,96.01 86.7,96.01 88.25,94.47 U23.19
CS_G23
  Top 0.254: JP24.13 108.71,93.22 109.56,94.07 R141.1 109.86,94.61 111.25,96.01 120.23,96.01 121.78,94.47 U24.19
CS_XM
  Top 0.254: JP1.12 11.68,9.14 11.68,15.24 | 11.68,15.24 11.68,16.5 11.95,16.76 19.49,16.76 21.03,15.23 U1.20 | R4.1 11.6,15.33 11.68,15.24
CS_XM1
  Top 0.254: JP2.12 45.21,9.14 45.21,15.24 | 45.21,15.24 45.21,16.5 45.48,16.76 53.02,16.76 54.56,15.23 U2.20 | R10.1 45.12,15.33 45.21,15.24
CS_XM2
  Top 0.254: JP3.12 78.74,9.14 78.74,15.24 | 78.74,15.24 78.74,16.5 79.01,16.76 86.55,16.76 88.09,15.23 U3.20 | R16.1 78.65,15.33 78.74,15.24
CS_XM3
  Top 0.254: JP4.12 112.27,9.14 112.27,15.24 | 112.27,15.24 112.27,16.5 112.53,16.76 120.08,16.76 121.61,15.23 U4.20 | R22.1 112.18,15.33 112.27,15.24
CS_XM4
  Top 0.254: JP5.12 11.68,24.89 11.68,30.99 | 11.68,30.99 11.68,32.25 11.95,32.51 19.49,32.51 21.03,30.98 U5.20 | R28.1 11.6,31.08 11.68,30.99
CS_XM5
  Top 0.254: JP6.12 45.21,24.89 45.21,30.99 | 45.21,30.99 45.21,32.25 45.48,32.51 53.02,32.51 54.56,30.98 U6.20 | R34.1 45.12,31.08 45.21,30.99
CS_XM6
  Top 0.254: JP7.12 78.74,24.89 78.74,30.99 | 78.74,30.99 78.74,32.25 79.01,32.51 86.55,32.51 88.09,30.98 U7.20 | R40.1 78.65,31.08 78.74,30.99
CS_XM7
  Top 0.254: JP8.12 112.27,24.89 112.27,30.99 | 112.27,30.99 112.27,32.25 112.53,32.51 120.08,32.51 121.61,30.98 U8.20 | R46.1 112.18,31.08 112.27,30.99
CS_XM8
  Top 0.254: JP9.12 11.68,40.64 11.68,46.74 | 11.68,46.74 11.68,47.99 11.95,48.26 19.49,48.26 21.03,46.72 U9.20 | R52.1 11.6,46.82 11.68,46.74
CS_XM9
  Top 0.254: JP10.12 45.21,40.64 45.21,46.74 | 45.21,46.74 45.21,47.99 45.48,48.26 53.02,48.26 54.56,46.72 U10.20 | R58.1 45.12,46.82 45.21,46.74
CS_XM10
  Top 0.254: JP11.12 78.74,40.64 78.74,46.74 | 78.74,46.74 78.74,47.99 79.01,48.26 86.55,48.26 88.09,46.72 U11.20 | R64.1 78.65,46.82 78.74,46.74
CS_XM11
  Top 0.254: JP12.12 112.27,40.64 112.27,46.74 | 112.27,46.74 112.27,47.99 112.53,48.26 120.08,48.26 121.61,46.72 U12.20 | R70.1 112.18,46.82 112.27,46.74
CS_XM12
  Top 0.254: JP13.12 11.68,56.39 11.68,62.48 | 11.68,62.48 11.68,63.74 11.95,64.01 19.49,64.01 21.03,62.47 U13.20 | R76.1 11.6,62.57 11.68,62.48
CS_XM13
  Top 0.254: JP14.12 45.21,56.39 45.21,62.48 | 45.21,62.48 45.21,63.74 45.48,64.01 53.02,64.01 54.56,62.47 U14.20 | R82.1 45.12,62.57 45.21,62.48
CS_XM14
  Top 0.254: JP15.12 78.74,56.39 78.74,62.48 | 78.74,62.48 78.74,63.74 79.01,64.01 86.55,64.01 88.09,62.47 U15.20 | R88.1 78.65,62.57 78.74,62.48
CS_XM15
  Top 0.254: JP16.12 112.27,56.39 112.27,62.48 | 112.27,62.48 112.27,63.74 112.53,64.01 120.08,64.01 121.61,62.47 U16.20 | R94.1 112.18,62.57 112.27,62.48
CS_XM16
  Top 0.254: JP17.12 11.68,72.14 11.68,78.23 | 11.68,78.23 11.68,79.49 11.95,79.76 19.49,79.76 21.03,78.22 U17.20 | R100.1 11.6,78.32 11.68,78.23
CS_XM17
  Top 0.254: JP18.12 45.21,72.14 45.21,78.23 | 45.21,78.23 45.21,79.49 45.48,79.76 53.02,79.76 54.56,78.22 U18.20 | R106.1 45.12,78.32 45.21,78.23
CS_XM18
  Top 0.254: JP19.12 78.74,72.14 78.74,78.23 | 78.74,78.23 78.74,79.49 79.01,79.76 86.55,79.76 88.09,78.22 U19.20 | R112.1 78.65,78.32 78.74,78.23
CS_XM19
  Top 0.254: JP20.12 112.27,72.14 112.27,78.23 | 112.27,78.23 112.27,79.49 112.53,79.76 120.08,79.76 121.61,78.22 U20.20 | R118.1 112.18,78.32 112.27,78.23
CS_XM20
  Top 0.254: JP21.12 11.68,87.88 11.68,93.98 | 11.68,93.98 11.68,95.24 11.95,95.5 19.49,95.5 21.03,93.97 U21.20 | R124.1 11.6,94.07 11.68,93.98
CS_XM21
  Top 0.254: JP22.12 45.21,87.88 45.21,93.98 | 45.21,93.98 45.21,95.24 45.48,95.5 53.02,95.5 54.56,93.97 U22.20 | R130.1 45.12,94.07 45.21,93.98
CS_XM22
  Top 0.254: JP23.12 78.74,87.88 78.74,93.98 | 78.74,93.98 78.74,95.24 79.01,95.5 86.55,95.5 88.09,93.97 U23.20 | R136.1 78.65,94.07 78.74,93.98
CS_XM23
  Top 0.254: JP24.12 112.27,87.88 112.27,93.98 | 112.27,93.98 112.27,95.24 112.53,95.5 120.08,95.5 121.61,93.97 U24.20 | R142.1 112.18,94.07 112.27,93.98
DEN_G
  Top 0.254: U1.10 26.03,14.73 26.67,15.37 29.97,15.37 30.48,14.86 30.48,10.16 JP1.5
DEN_G1
  Top 0.254: U2.10 59.56,14.73 60.2,15.37 63.5,15.37 64.01,14.86 64.01,10.16 JP2.5
DEN_G2
  Top 0.254: U3.10 93.09,14.73 93.73,15.37 97.03,15.37 97.54,14.86 97.54,10.16 JP3.5
DEN_G3
  Top 0.254: U4.10 126.61,14.73 127.25,15.37 130.56,15.37 131.06,14.86 131.06,10.16 JP4.5
DEN_G4
  Top 0.254: U5.10 26.03,30.48 26.67,31.11 29.97,31.11 30.48,30.61 30.48,25.91 JP5.5
DEN_G5
  Top 0.254: U6.10 59.56,30.48 60.2,31.11 63.5,31.11 64.01,30.61 64.01,25.91 JP6.5
DEN_G6
  Top 0.254: U7.10 93.09,30.48 93.73,31.11 97.03,31.11 97.54,30.61 97.54,25.91 JP7.5
DEN_G7
  Top 0.254: U8.10 126.61,30.48 127.25,31.11 130.56,31.11 131.06,30.61 131.06,25.91 JP8.5
DEN_G8
  Top 0.254: U9.10 26.03,46.22 26.67,46.86 29.97,46.86 30.48,46.35 30.48,41.66 JP9.5
DEN_G9
  Top 0.254: U10.10 59.56,46.22 60.2,46.86 63.5,46.86 64.01,46.35 64.01,41.66 JP10.5
DEN_G10
  Top 0.254: U11.10 93.09,46.22 93.73,46.86 97.03,46.86 97.54,46.35 97.54,41.66 JP11.5
DEN_G11